# Altium PCB DL-5新款球锁-20201230.PcbDoc (part 1 of 2)
Units mm, origin at the board's own origin, x right, y up, seen from the top; angles counter-clockwise.
Board outline 55.99 x 50 mm, 4 copper layers (Top Layer, POWER, GND, Bottom Layer); 97 components, 70 nets, 304 pads, 134 vias.
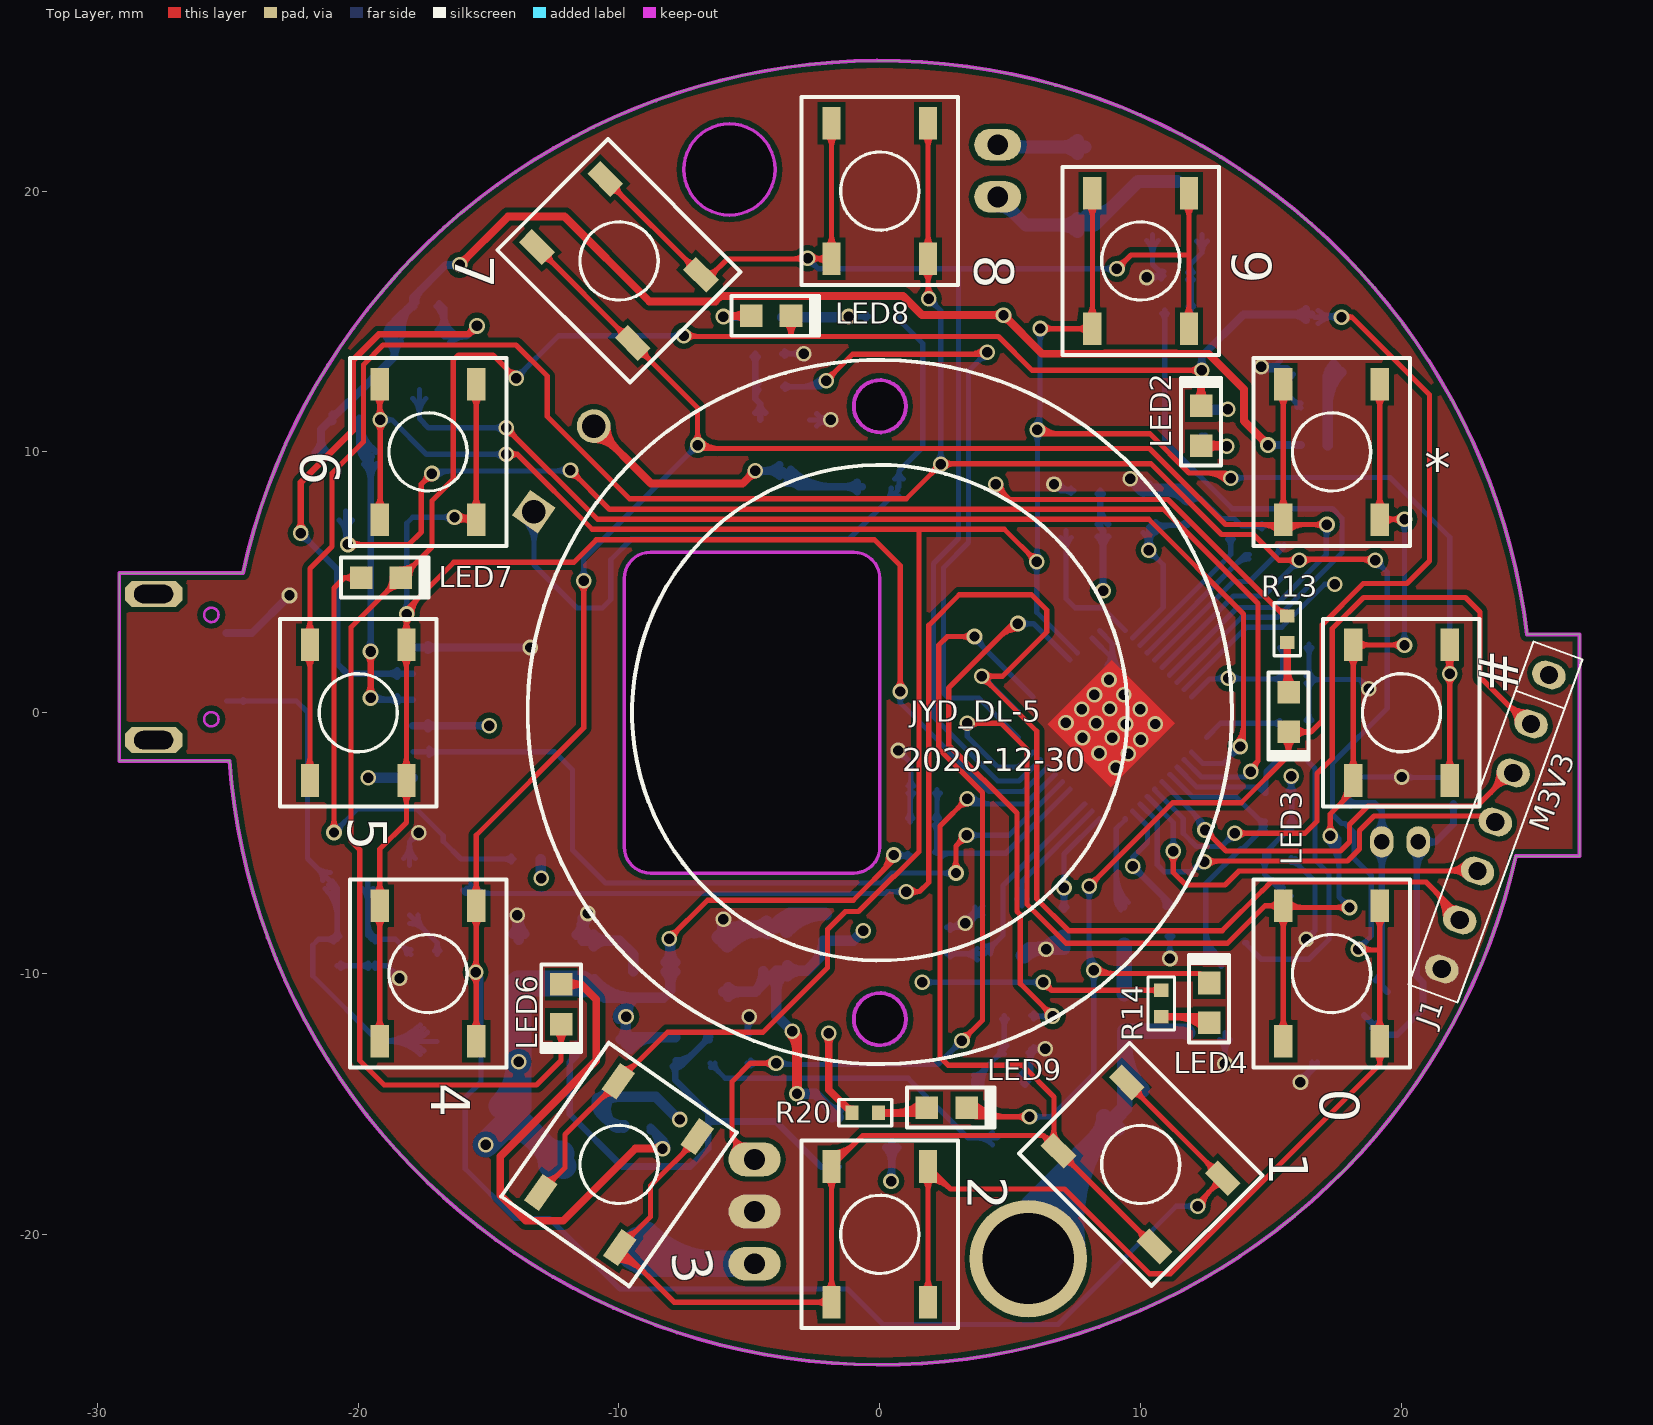
[diagram p0: Top Layer view]
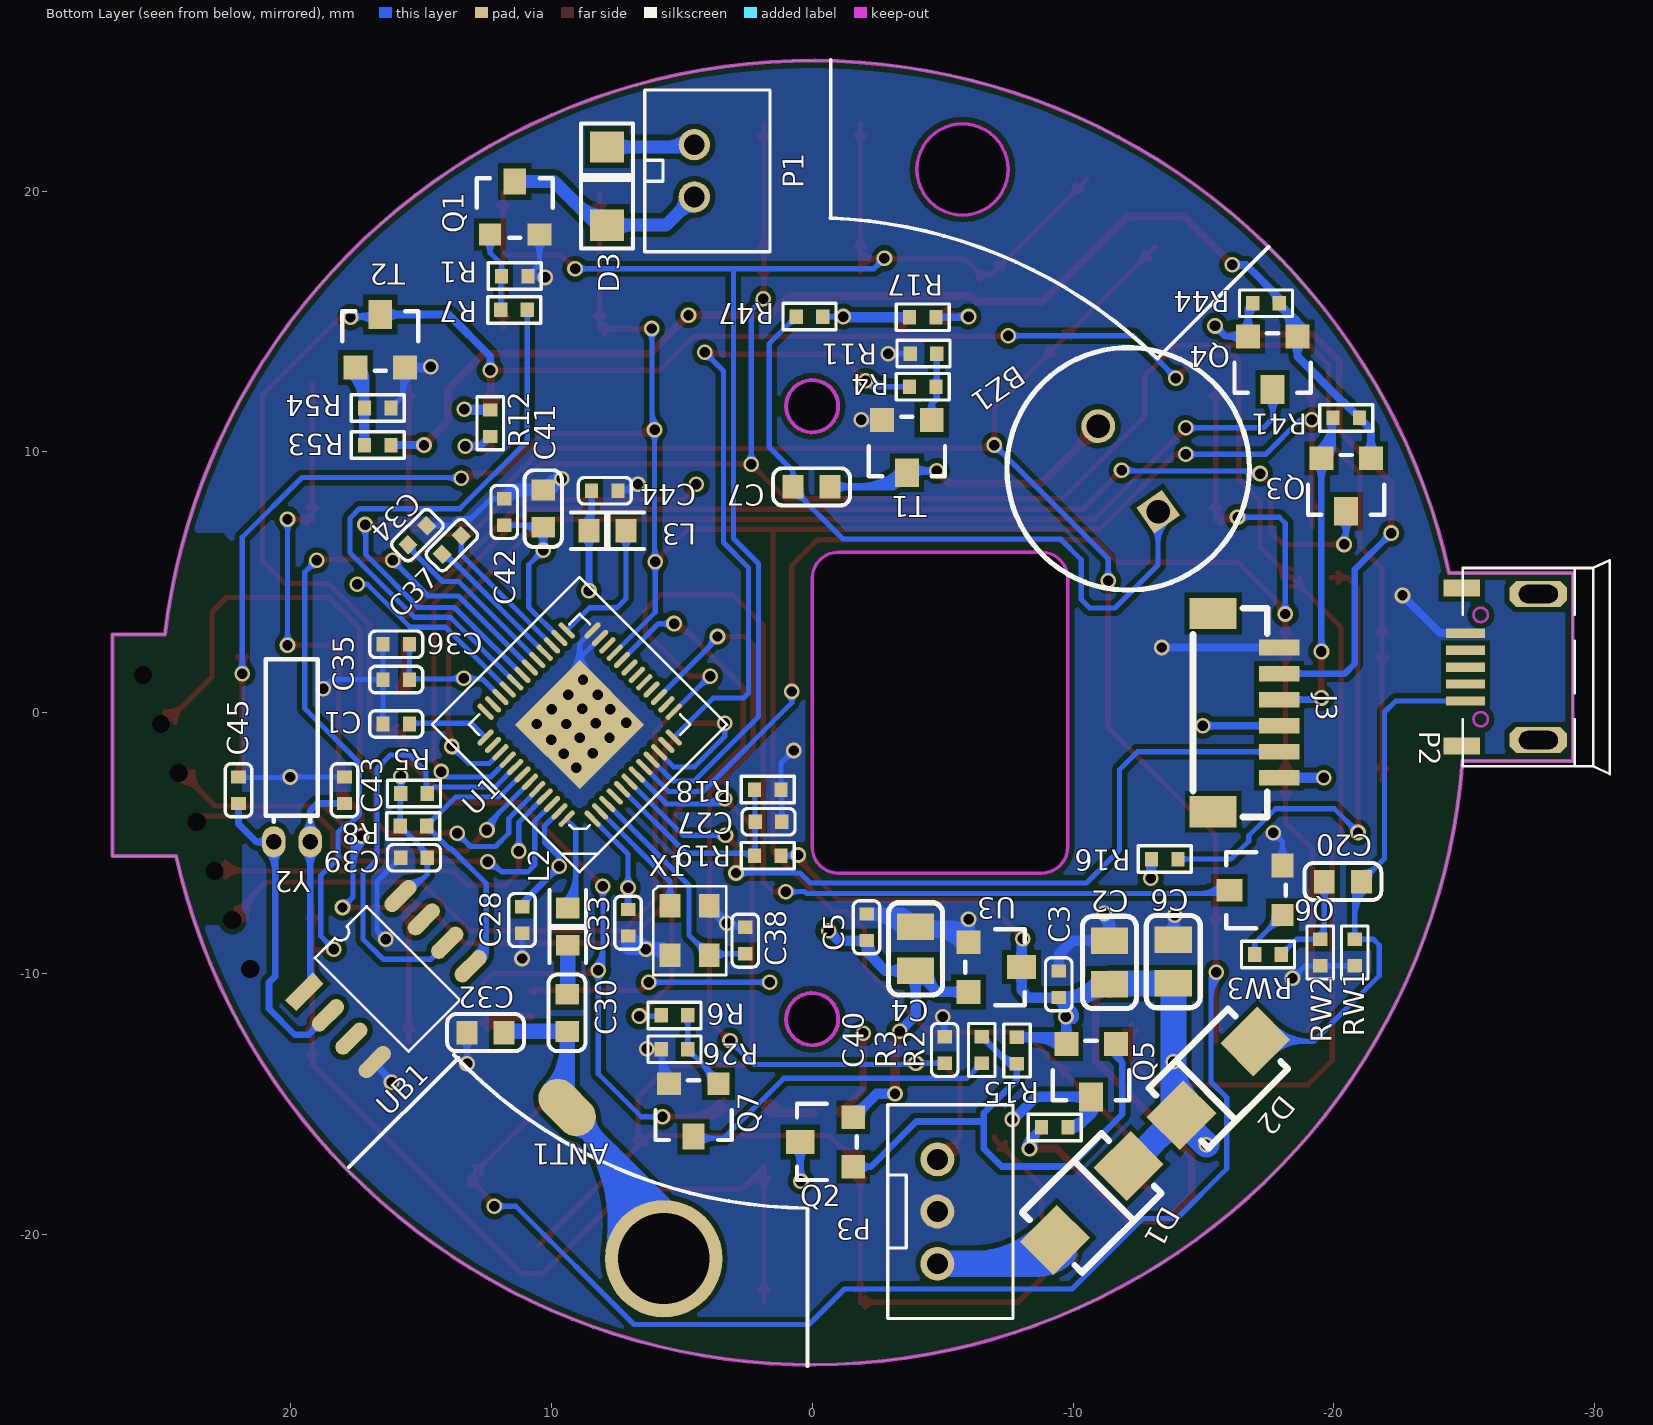
[diagram p1: Bottom Layer view, seen from below]
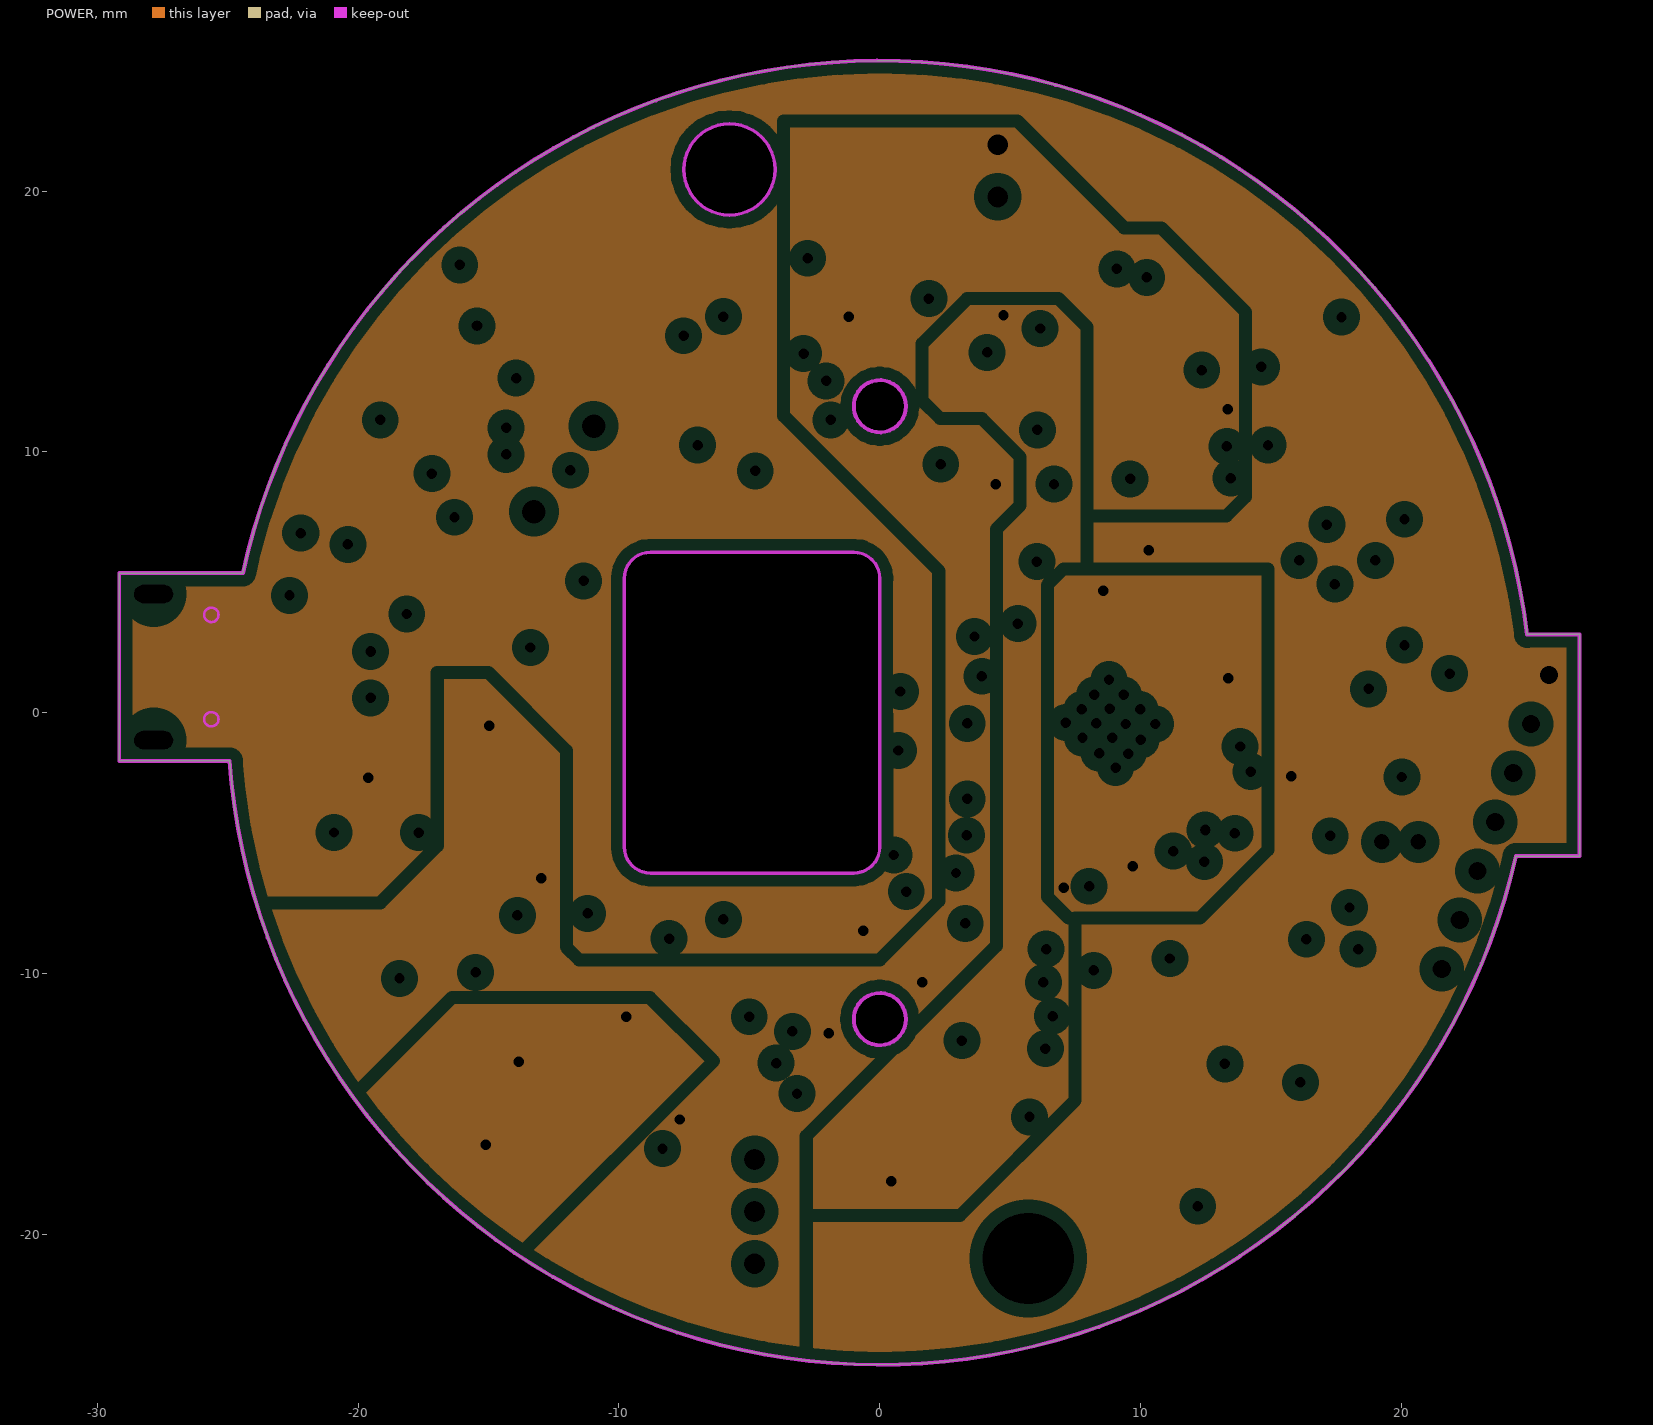
[diagram p2: POWER, clearances drawn from the general rule]
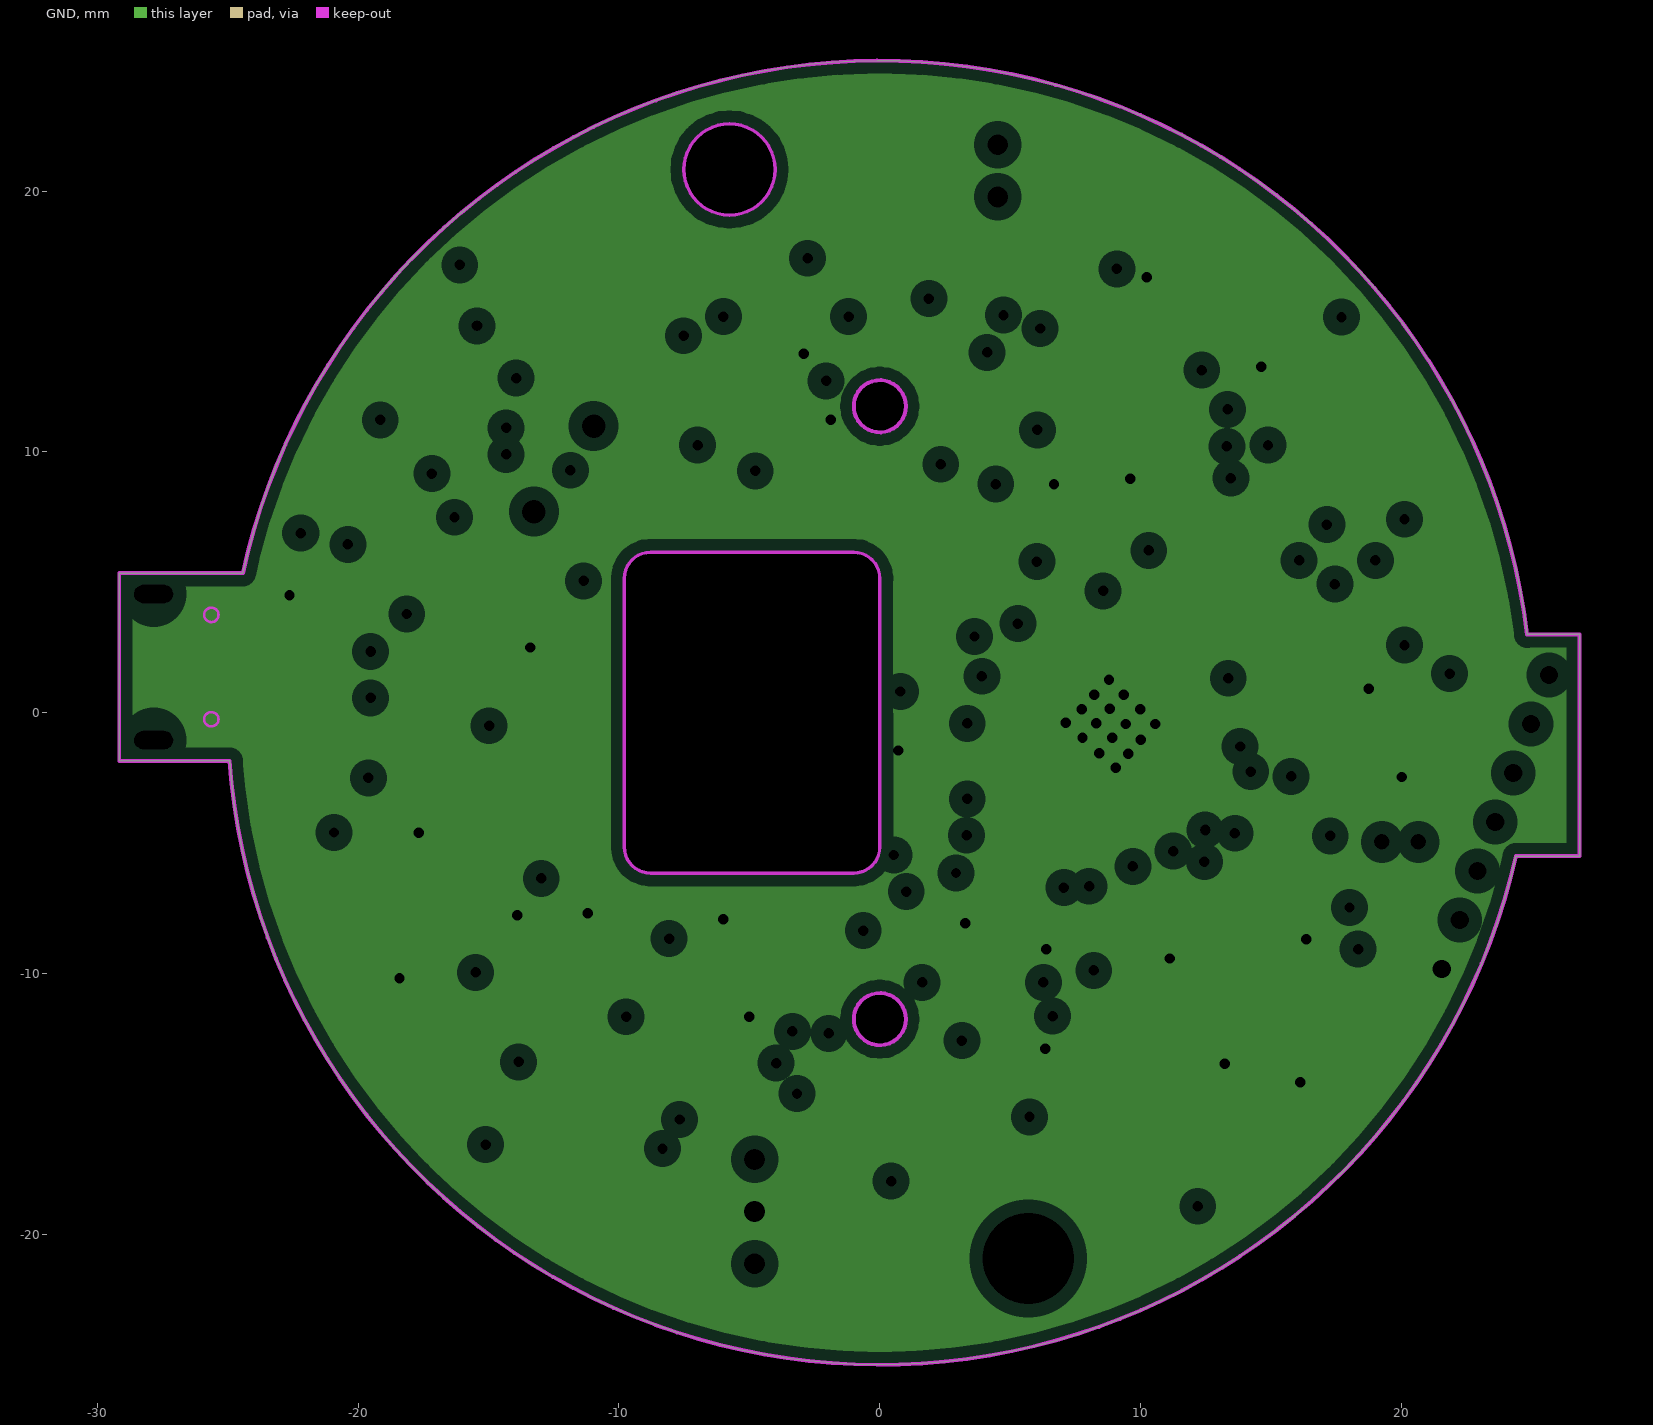
[diagram p3: GND, clearances drawn from the general rule]
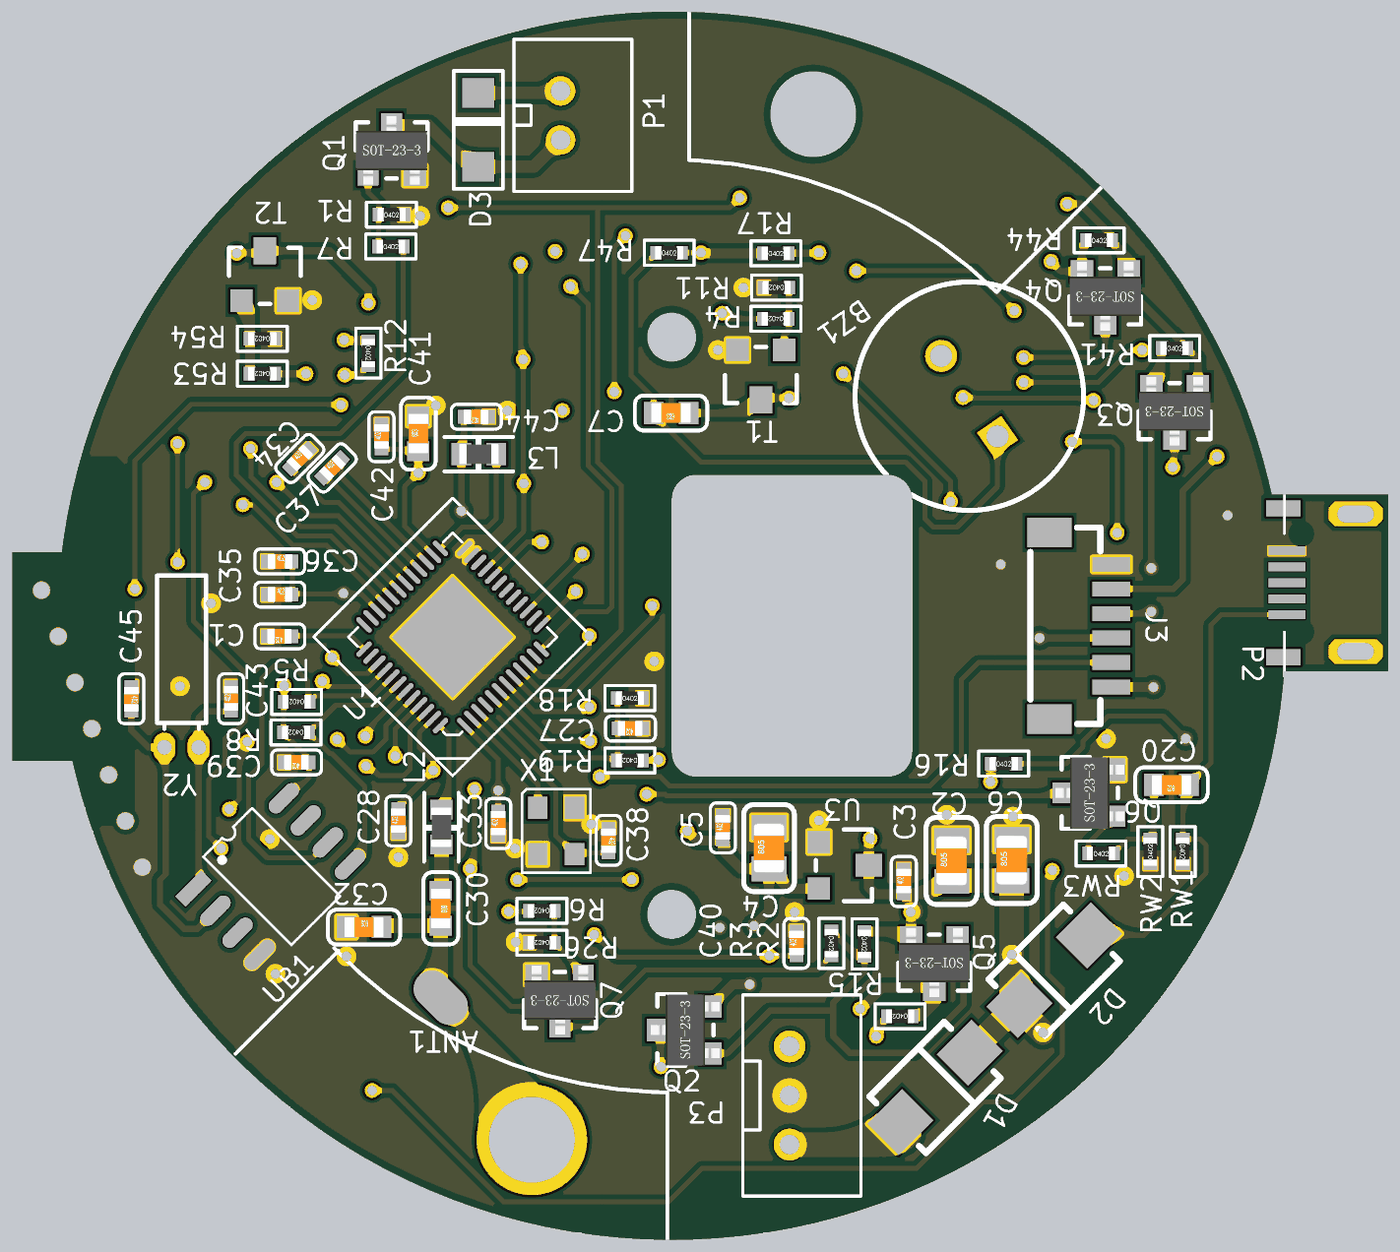
[diagram p5: 3D render of the assembled board from below, using the file's embedded part models]

## Layer stack, top to bottom
Top Layer: signal copper 0.0356
Dielectric: core 0.32, FR-4, Dk 4.8
POWER: plane copper 0.0356, net (Multiple Nets)
Dielectric: prepreg 0.32, FR-4, Dk 4.8
GND: plane copper 0.0356, net GND
Dielectric: core 0.32, FR-4, Dk 4.8
Bottom Layer: signal copper 0.0356

## Board outline
-29.159,-1.85 -29.159,5.35 -24.42,5.35 -24.42,5.352 cw(c0,0) 24.82,2.998 24.841,3 26.833,3 26.833,-5.5 24.409,-5.5 24.389,-5.495 cw(c0,0) -24.931,-1.851 -24.931,-1.85
cut-out: -7.513,20.828 ccw(c-5.763,20.828) -5.763,19.078 ccw(c-5.763,20.828) -4.013,20.828 ccw(c-5.763,20.828) -5.763,22.578 ccw(c-5.763,20.828)
cut-out: -1,11.75 ccw(c0,11.75) 0,10.75 ccw(c0,11.75) 1,11.75 ccw(c0,11.75) 0,12.75 ccw(c0,11.75)
cut-out: -1,-11.75 ccw(c0,-11.75) 0,-12.75 ccw(c0,-11.75) 1,-11.75 ccw(c0,-11.75) 0,-10.75 ccw(c0,-11.75)
cut-out: -9.794,-5.15 -9.794,5.15 cw(c-8.794,5.15) -8.794,6.15 -1,6.15 cw(c-1,5.15) 0,5.15 0,-5.15 cw(c-1,-5.15) -1,-6.15 -8.794,-6.15 cw(c-8.794,-5.15)

## Design rules (kind name [scope] priority, off if disabled: settings)
Clearance Clearance_3 [All] p1 off: gap=0.2
Clearance Clearance_2 [(IsWire)or(IsThruPin)or(IsFill)or(InPolygon)or(IsKeepOut)] p2 off: gap=0.178
Clearance Clearance_1 [InComponent('P2')] p3 off: gap=0.178
Clearance [All] p4: gap=0.18
ComponentClearance [All] p1: gap=0 collisioncheckmode=3 verticalgap=0 showdistances=FALSE
HoleSize [All] p1: absolutevalues=TRUE maxlimit=12.7 minlimit=0.025 maxpercent=80.000 minpercent=20.000
MinimumSolderMaskSliver [All] p1: minsoldermaskwidth=0
PlaneClearance [All] p1: clearance=0.508
PlaneConnect [All] p1: planeconnectstyle=Direct reliefexpansion=0.508 reliefentries=4 reliefconductorwidth=0.254 reliefairgap=0.254
PolygonConnect PolygonConnect_1 [IsVia] p1: connectstyle=Direct reliefconductorwidth=0.254 reliefentries=4 polygonreliefangle="90 Angle" airgapwidth=0.254
PolygonConnect [All] p2: connectstyle=Direct reliefconductorwidth=0.254 reliefentries=4 polygonreliefangle="90 Angle" airgapwidth=0.254
RoutingVias [All] p1: holewidth=0.4 width=0.6 viastyle="Through Hole" minholewidth=0.4 minwidth=0.6 maxholewidth=5 maxwidth=6
SilkToSilkClearance [All] p1: silktosilkclearance=0
SilkToSolderMaskClearance [IsPad] p1: minsilkscreentomaskgap=0 clearancetoexposedcopper=TRUE
SolderMaskExpansion [All] p1: expansion=0.102
Width [All] p1: maxlimit=2 minlimit=0.15 preferedwidth=0.2
21 further rules are at their usual default settings.

## Components (designator, comment, footprint, x,y, rotation, side; value= is the part's Value field where it differs from the comment)
0 "SW" KEY_5.2*3.7*6.4 17.322,-10 r270 top locked
1 "SW" KEY_5.2*3.7*6.4 10.001,-17.321 r315 top locked
2 "SW" KEY_5.2*3.7*6.4 0.001,-20 r270 top
3 "SW" KEY_5.2*3.7*6.4 -9.999,-17.321 r55 top
4 "SW" KEY_5.2*3.7*6.4 -17.319,-10 r270 top locked
5 "SW" KEY_5.2*3.7*6.4 -19.999,0 r90 top locked
6 "SW" KEY_5.2*3.7*6.4 -17.319,10 r90 top
7 "SW" KEY_5.2*3.7*6.4 -9.999,17.321 r135 top locked
8 "SW" KEY_5.2*3.7*6.4 0.001,20 r270 top locked
9 "SW" KEY_5.2*3.7*6.4 10.001,17.321 r90 top locked
# "SW" KEY_5.2*3.7*6.4 20.001,0 r270 top
* "SW" KEY_5.2*3.7*6.4 17.322,10 r90 top locked
ANT1 "ANT" ANT_mark 9.398,-15.138 r45 bottom
BZ1 "BUZZER" BUZZER_D93_L40 -12.116,9.347 r55 bottom
C1 "100nF" 0402C 15.951,-0.432 r0 bottom
C2 "10uF" 0805C -11.393,-9.574 r90 bottom
C3 "100nF" 0402C -9.449,-10.414 r90 bottom
C4 "10uF" 0805C -3.962,-9.054 r90 bottom
C5 "100nF" 0402C -2.083,-8.23 r90 bottom
C6 "220uF" 0805C -13.844,-9.541 r90 bottom
C7 "10uF" 0603C 0.025,8.661 r0 bottom
C20 "10uF" 0603C -20.345,-6.477 r0 bottom
C27 "1nF" 0402C 1.676,-4.183 r0 bottom
C28 "1uF" 0402C 11.125,-7.95 r90 bottom
C30 "1.5pF" 0603C 9.398,-11.506 r270 bottom
C32 "1pF" 0603C 12.522,-12.268 r180 bottom
C33 "100nF" 0402C 7.061,-8.052 r90 bottom
C34 "100nF" 0402C 15.138,6.807 r135 bottom
C35 "1uF" 0402C 15.951,1.27 r180 bottom
C36 "100nF" 0402C 15.951,2.621 r180 bottom
C37 "100nF" 0402C 13.818,6.426 r135 bottom
C38 "2.7pF" 0402C 2.565,-8.738 r270 bottom
C39 "100nF" 0402C 15.265,-5.563 r0 bottom
C40 "1nF" 0402C -5.08,-12.929 r90 bottom
C41 "10uF" 0603C 10.312,7.823 r90 bottom
C42 "100nF" 0402C 11.811,7.696 r90 bottom
C43 "22pF" 0402C 17.932,-2.972 r90 bottom
C44 "10uF" 0402C 7.95,8.509 r0 bottom
C45 "22pF" 0402C 21.996,-2.972 r270 bottom
D1 "SS14" DO-214AA -10.719,-18.796 r315 bottom
D2 "SS14" DO-214AA -15.57,-14.021 r135 bottom
D3 "IN4148" SOD-123 7.874,20.193 r90 bottom
J1 "7P" 7P-2.0MM 25.654,1.448 r250 top
J3 "指纹串口" "6P-1.0mm 立式" -16.637,0 r270 bottom
L2 "2nH" 0603L 9.373,-8.204 r90 bottom
L3 "2.2UH" 0603L 7.849,6.985 r0 bottom
LED2 "BLUE" 0603LED 12.319,10.998 r90 top
LED3 "BLUE" 0603LED 15.672,0.025 r270 top
LED4 "BLUE" 0603LED 12.624,-11.125 r90 top
LED6 "BLUE" 0603LED -12.217,-11.176 r270 top
LED7 "BLUE" 0603LED -19.126,5.182 r0 top
LED8 "BLUE" 0603LED -4.166,15.215 r0 top
LED9 "BLUE" 0603LED 2.565,-15.138 r0 top
P1 "外接磁线圈" B2B-PH 4.521,20.777 r90 bottom
P2 "MICROUSB" MICRO-USB_F-B -26.441,1.75 r90 bottom
P3 "电池盒" B3B-PH -4.801,-19.126 r90 bottom
Q1 "S8050" "SOT-23 - BCE" 11.405,19.355 r180 bottom
Q2 "SI2301" "SOT-23 - GDS" -0.559,-16.459 r90 bottom
Q3 "BSS123W" "SOT-23 - GDS" -20.472,8.738 r0 bottom
Q4 "BSS123W" "SOT-23 - GDS" -17.653,13.411 r0 bottom
Q5 "SI2301" "SOT-23 - GDS" -10.693,-13.716 r0 bottom
Q6 "PMBT3904" "SOT-23 - BCE" -17.018,-6.807 r90 bottom
Q7 "PMBT3904" "SOT-23 - BCE" 4.547,-15.24 r0 bottom
R1 "10K" 0402R#1 11.405,16.739 r180 bottom
R2 "100K" 0402R#1 -7.849,-12.954 r270 bottom
R3 "1K" 0402R#1 -6.502,-12.929 r270 bottom
R4 "200R" 0402R#1 -4.242,12.497 r0 bottom
R5 "10K" 0402R#1 15.265,-3.099 r0 bottom
R6 "4.7K" 0402R#1 5.283,-11.608 r0 bottom
R7 "1K" 0402R#1 11.43,15.443 r180 bottom
R8 "10K" 0402R#1 15.291,-4.343 r0 bottom
R11 "10K" 0402R#1 -4.267,13.767 r0 bottom
R12 "1K" 0402R#1 12.344,11.1 r270 bottom
R13 "1K" 0402R#1 15.621,3.2 r270 top
R14 "1K" 0402R#1 10.795,-11.151 r270 top
R15 "1K" 0402R#1 -9.296,-15.9 r0 bottom
R16 "1K" 0402R#1 -13.513,-5.613 r180 bottom
R17 "1K" 0402R#1 -4.242,15.164 r180 bottom
R18 "100K%1" 0402R#1 1.702,-2.946 r180 bottom
R19 "510%1" 0402R#1 1.702,-5.486 r0 bottom
R20 "1K" 0402R#2 -0.559,-15.342 r180 top
R26 "10K" 0402R#1 5.281,-12.905 r0 bottom
R41 "10K" 0402R#1 -20.472,11.303 r180 bottom
R44 "10K" 0402R#1 -17.399,15.697 r180 bottom
R47 "10R" 0402R#1 0.102,15.189 r180 bottom
R53 "1K" 0402R#1 16.662,10.262 r0 bottom
R54 "10K" 0402R#1 16.662,11.684 r0 bottom
RW1 "100K" 0402R#1 -20.803,-9.195 r270 bottom
RW2 "100K" 0402R#1 -19.482,-9.195 r90 bottom
RW3 "100R" 0402R#1 -17.475,-9.271 r180 bottom
T1 "SS8050" SOT-23-3L -3.632,10.211 r0 bottom
T2 "SS8050" SOT-23-3L 16.561,14.249 r180 bottom
U1 "BK3435QFN48_A" QFN48_6*6*0.4 8.915,-0.457 r45 bottom
U3 "HT7533" SOT-23-3L -7.01,-9.754 r270 bottom
UB1 "PCF8563" SOP8 16.281,-10.211 r135 bottom
X1 "16MHZ" XTAL3225 4.699,-8.357 r270 bottom
Y2 "32.768KHZ" 晶振-9 20.65,-4.953 r180 bottom

## Footprints (in the part's own frame and the unit in brackets; to place one, negate y for a bottom-side part, rotate by r counter-clockwise, add the part's x,y. Pads: shape width x height; smd on the part's side, far side on the other; paste and mask are expansions set on the pad)
"6P-1.0mm 立式" [mm]
  rect 0.6x1.55 smd: 1(2.5,1.262) 2(1.5,1.262) 3(0.5,1.262) 4(-0.5,1.262) 5(-1.5,1.262) 6(-2.5,1.262)
  rect 1.2x1.8 smd: 7(-3.8,-1.263) 8(3.8,-1.263)
  silkscreen extent -4,-2.04 4,0.81
7P-2.0MM [mm]
  oval 1x1.3 / inner oval 1x1.3 / far side round 0 hole 0.7 mask+0.05: 1(0,0) 2(2,0) 3(4,0) 4(6,0) 5(8,0) 6(10,0) 7(12,0)
  silkscreen extent -1,-1 13,1
0402C [mil]
  rect 20x22 smd mask+2: 1(-20,0) 2(20,0)
  silkscreen extent -40,-20 40,20, body extent -19,-12 20,12, height 8
0402R#1 [mil]
  rect 20x22 smd mask+2: 1(-20,0) 2(20,0)
  silkscreen extent -40,-20 40,20, body extent -23,-11 23,11, height 16
0402R#2 [mil]
  rect 20x22 smd mask+2: 1(20,0) 2(-20,0)
  silkscreen extent -40,-20 40,20, body extent -23,-11 23,11, height 16
0603C [mm]
  rect 0.8x0.9 smd: 1(-0.711,0) 2(0.711,0)
  silkscreen extent -1.47,-0.71 1.47,0.71, body extent -0.8,-0.4 0.8,0.4, height 0.3
0603L [mm]
  rect 0.8x0.9 smd: 1(-0.711,0) 2(0.711,0)
  silkscreen extent -1.4,-0.7 1.4,0.7, body extent -0.82,-0.41 0.82,0.41, height 0.46
0603LED [mil]
  rect 34x34 smd: 1(-30,0) 2(30,0)
  silkscreen extent -60,-30 72,30, body extent -32,-16 31,16, height 24
0805C [mil]
  rect 40x56 smd: 1(-33,0) 2(33,0)
  silkscreen extent -70,-41 70,41, body extent -39,-25 39,25, height 30
ANT_mark [mm]
  oval 2.5x1.5 smd: 1(0,0)
B2B-PH [mm]
  round 1.2 / inner round 1.2 / far side oval 1.2x1.8 hole 0.8 mask+0.05: 1(-1,0) 2(1,0)
  silkscreen extent -3.1,-2.9 3.1,1.9
B3B-PH [mm]
  round 1.3 / inner round 1.3 / far side oval 1.3x2 hole 0.8 mask+0.05: 1(-2,0) 2(0,0) 3(2,0)
  silkscreen extent -4.1,-2.9 4.1,1.9
BUZZER_D93_L40 [mm]
  rect 1.2x1.2 hole 0.9: 1(-2,0)
  round 1.3 hole 0.9: 2(2,0)
  silkscreen extent -4.65,-4.65 4.65,4.65
DO-214AA [mm]
  rect 2x1.8 smd: 1(2,0) 2(-2,0)
  silkscreen extent -2.15,-1.62 2.15,1.62
KEY_5.2*3.7*6.4 [mm]
  rect 1.25x0.7 smd: 1(-2.6,1.85) 1(2.6,1.85) 2(-2.6,-1.85) 2(2.6,-1.85)
  silkscreen extent -3.6,-3 3.6,3
MICRO-USB_F-B [mm]
  rect 0.36x1.5 smd mask+0.05: 1(-1.3,1.4) 2(-0.65,1.4) 3(0,1.4) 4(0.65,1.4) 5(1.3,1.4)
  oct 1x2.2 hole 0.7 slot 1.5 at 90 deg mask+0.05: 6(2.8,-1.4) 7(-2.8,-1.4)
  rect 0.65x1.4 smd: 8(3.029,1.543) 9(-3.029,1.543)
  Keep-Out Layer circle w0.1: c2,0.813 r0.275
  Keep-Out Layer circle w0.1: c-2,0.813 r0.275
  silkscreen extent -4.1,-4.14 4.1,1.5
QFN48_6*6*0.4 [mm]
  rect 3.5x3.5 smd: 0(0,0)
  oval 0.8x0.2 smd: 1(-2.9,2.2) 2(-2.9,1.8) 3(-2.9,1.4) 4(-2.9,1) 5(-2.9,0.6) 6(-2.9,0.2) 7(-2.9,-0.2) 8(-2.9,-0.6) 9(-2.9,-1) 10(-2.9,-1.4) 11(-2.9,-1.8) 12(-2.9,-2.2) 25(2.9,-2.2) 26(2.9,-1.8) 27(2.9,-1.4) 28(2.9,-1) 29(2.9,-0.6) 30(2.9,-0.2) 31(2.9,0.2) 32(2.9,0.6) 33(2.9,1) 34(2.9,1.4) 35(2.9,1.8) 36(2.9,2.2)
  oval 0.2x0.8 smd: 13(-2.2,-2.9) 14(-1.8,-2.9) 15(-1.4,-2.9) 16(-1,-2.9) 17(-0.6,-2.9) 18(-0.2,-2.9) 19(0.2,-2.9) 20(0.6,-2.9) 21(1,-2.9) 22(1.4,-2.9) 23(1.8,-2.9) 24(2.2,-2.9) 37(2.2,2.9) 38(1.8,2.9) 39(1.4,2.9) 40(1,2.9) 41(0.6,2.9) 42(0.2,2.9) 43(-0.2,2.9) 44(-0.6,2.9) 45(-1,2.9) 46(-1.4,2.9) 47(-1.8,2.9) 48(-2.2,2.9)
  silkscreen extent -4,-4 4,4
SOD-123 [mm]
  rect 1.2x1.3 smd mask+0.05: 1(-1.5,0) 2(1.5,0)
  silkscreen extent -2.4,-1 2.4,1
SOP8 [mm]
  rect 1.5x0.6 smd mask+0.05: 1(-2.6,1.905)
  oval 1.5x0.6 smd mask+0.05: 2(-2.6,0.635) 3(-2.6,-0.635) 4(-2.6,-1.905) 5(2.6,-1.905) 6(2.6,-0.635) 7(2.6,0.635) 8(2.6,1.905)
  round 0.4 on Bottom Overlay mask+0.05: ""(-0.949,1.905)
  silkscreen extent -1.4,-2.54 1.4,2.54
"SOT-23 - BCE" [mm]
  rect 0.85x0.85 smd: B(-0.95,-1.016)
  rect 0.85x1 smd: C(0,1.016)
  rect 0.914x0.85 smd: E(0.95,-1.016)
  silkscreen extent -1.46,-1.14 1.46,1.14, body extent -1.45,-1.4 1.45,1.4, height 1.2
"SOT-23 - GDS" [mil]
  rect 36x43.31 smd: D(0,40)
  rect 36x36 smd: G(-37.4,-40) S(37.4,-40)
  silkscreen extent -57,-45 58,45, body extent -57,-55 57,55, height 47
SOT-23-3L [mil]
  rect 36x36 smd: 1(-37.4,-40) 2(37.4,-40)
  rect 36x43.31 smd: 3(0,40)
  silkscreen extent -57,-45 58,45
XTAL3225 [mm]
  rect 0.9x0.8 smd: 1(-0.95,-0.75) 2(0.95,-0.75) 3(0.95,0.75) 4(-0.95,0.75)
  silkscreen extent -1.7,-1.4 1.7,1.4
晶振-9 [mm]
  oval 0.9x1.2 hole 0.6: 1(0,0) 2(1.4,0)
  rect 0x0 smd: 3(0.635,8)
  silkscreen extent -0.3,0.76 1.7,7

## Part data
0 1 2 3 4 5 6 7 8 9 # *: "Switch"
ANT1: library part Socket, "Socket"
BZ1: "Buzzer"
C1 C28 C30 C32 C33 C34 C35 C36 C37 C38 C41 C42 C44: library part Cap, "Capacitor"
C2 C4: library part CAP-P, "Capacitor, tolerance ±20%"
C3: library part "CAP NP"
C5 C6 C7 C20 C27: library part CAP-NP, "Capacitor, Ceramic"
C39 C40 C43 C45: library part C
D1 D2 D3: library part D
J3: library part "Header 6", "Header, 6-Pin"
L2 L3: "Power Inductor, 4.7uH, 0.7A, 260mR DCR"
LED2 LED3 LED4 LED6 LED7 LED8 LED9: library part LED
P1: library part "Header 2", "Header, 2-Pin"
P2: library part MHDR1X2, "Header, 2-Pin"
P3: library part "Header 3", "Header, 3-Pin"
Q1: library part PMBT3904_Dup1
Q2 Q5: library part PWRMOSFET_EP_DGS_0
Q3 Q4: library part BSS123L_0
R1 R7 R41 R44: library part RES
R2 R3 R5 R6 R8 R12 R13 R14 R15 R16 R17 R20 R26 R53 R54 RW1 RW2 RW3: library part R
R4 R11 R47: library part R_Dup1
R18 R19: library part Res2, "Resistor"
T1 T2: library part NPN_BJT, "Bipolar Junction Transistor"
U1: library part EFR32BG1-QFN48
U3: library part XC6206P302M
UB1: library part IC8
Y2: library part 晶振

## Free pads (board coordinates)
  round 4.5 hole 3.5: 1(5.692,-20.929)

## Via types
v1: diameter 0.6, hole 0.4, Top Layer to Bottom Layer, 110 vias
v2: diameter 0.6, hole 0.4, Top Layer to Bottom Layer, tented both sides, 12 vias
v3: diameter 0.61, hole 0.406, Top Layer to Bottom Layer, 6 vias
v4: diameter 0.61, hole 0.4, Top Layer to Bottom Layer, 4 vias
v5: diameter 0.61, hole 0.406, Top Layer to Bottom Layer, tented both sides, 2 vias

## Nets (pads, with @x,y where several pads share a name; then routed paths per layer and width w, separated by ;. In a path a pad name is that pad's centre, name@x,y a point inside that pad or via, vN(x,y) a via of type N, cw(c..) or ccw(c..) an arc to the next point about the centre after c; other vN are vias at no path point)
ANT: ANT1.1 C30.2 C32.2 pad.1 | length 39.7
  Bottom Layer w0.6: pad.1@5.248,-21 cw(c8.142,-20.539) 6.07,-18.467 ; pad.1@5.692,-20.929 5.692,-19.124 pad.1@5.832,-18.984 ; pad.1@5.692,-18.844 ANT1.1@9.398,-15.138 ; pad.1@5.84,-20.905 cw(c9.578,-20.311) 6.902,-17.635 ; pad.1@6.433,-20.811 cw(c11.014,-20.083) 7.734,-16.803 ; pad.1@7.025,-20.717 cw(c12.45,-19.854) ANT1.1@8.566,-15.971 ; pad.1@7.618,-20.623 cw(c13.885,-19.626) ANT1.1@9.398,-15.138 ; 8.164,-16.541 cw(c9.374,-17.394) ANT1.1@9.121,-15.935 ; 8.485,-16.086 ccw(c7.919,-15.687) ANT1.1@8.601,-15.569 ; ANT1.1@8.594,-15.492 cw(c7.508,-15.492) 8.276,-16.26 cw(c9.044,-17.028) ANT1.1@9.044,-15.942 ; 9.398,-12.845 ccw(c11.692,-12.845) ANT1.1@10.07,-14.467 ; C32.2@11.811,-12.268 11.76,-12.217 C30.2@9.398,-12.217 ANT1.1@9.398,-15.138
BAT_ADC: C27.2 R18.1 R19.2 U1.5 | length 11.4
  Bottom Layer w0.2: C27.2@2.076,-4.317 cw(c1.813,-4.58) 2.184,-4.58 cw(c2.556,-4.58) C27.2@2.293,-4.317 ; C27.2@2.076,-4.048 ccw(c1.789,-3.762) 2.194,-3.762 ; R19.2@2.101,-5.352 ccw(c1.899,-5.15) 2.184,-5.15 ; R18.1@2.101,-3.081 cw(c1.876,-3.306) 2.194,-3.306 ; 2.184,-5.028 ccw(c2.643,-5.028) R19.2@2.319,-5.352 ; C27.2@2.184,-4.183 2.184,-5.385 4.836,-5.385 U1.5@7.289,-2.932 ; C27.2@2.194,-4.183 R18.1@2.194,-2.955 ; 2.194,-3.809 ccw(c2.533,-3.809) C27.2@2.293,-4.048 ; 2.194,-3.381 cw(c2.619,-3.381) R18.1@2.319,-3.081 ; R19.2@2.319,-5.57 cw(c2.766,-6.017) 2.766,-5.385
BEEP: R4.2 U1.12 | length 30.2
  Top Layer w0.2: v1(-2.057,12.725) -1.041,13.741 4.039,13.741 v1(4.115,13.818) ; v1@-2.057,12.925 ccw(c-2.057,13.408) -1.716,13.067 ccw(c-1.375,12.725) v1@-1.857,12.725 ; 3.448,13.741 ccw(c3.448,14.484) v1@3.973,13.959 ; 3.816,13.741 cw(c3.816,13.519) v1@3.973,13.676
  Bottom Layer w0.2: R4.2@-3.734,12.497 -2.286,12.497 v1(-2.057,12.725) cw(c-2.609,13.277) -2.609,12.497 ; R4.2@-3.625,12.388 cw(c-3.362,12.125) -3.362,12.497 cw(c-3.362,12.869) R4.2@-3.625,12.606 ; -3.092,12.497 ccw(c-3.092,13.76) v1@-2.199,12.867 ; v1@3.915,13.818 cw(c3.432,13.818) 3.773,13.476 cw(c4.115,13.135) v1@4.115,13.618 ; v1(4.115,13.818) 3.403,13.105 3.403,6.523 2.438,5.559 2.438,0.75 2.623,0.566 3.791,0.566 U1.12@5.309,-0.952
CE(RST): U1.16
GND: C1.2 C2.2 C3.2 C4.2 C5.2 C6.2 C27.1 C28.1 C32.1 C33.1 C34.2 C35.1 C36.1 C38.1 C39.2 C40.2 C41.2 C42.2 C43.2 C44.1 C45.1 J1.7 J3.6 P2.5 P3.2 Q1.E Q6.E Q7.E R1.2 R11.2 R18.2 R26.2 R54.1 RW1.2 RW2.1 T1.2 T2.2 U1.0 U1.23 U1.24 U3.1 UB1.4 X1.2 X1.4 | length 180.3
  Top Layer w0.2: v1@-5.004,-11.786 v1(-5.004,-11.659) ; v1(11.125,-9.423) v1@11.125,-9.398
  Bottom Layer w0.2: RW1.2@-20.803,-9.703 RW2.1@-19.482,-9.703 -18.898,-9.703 v1(-18.415,-10.185) ; RW1.2@-20.668,-9.812 cw(c-20.405,-10.075) -20.405,-9.703 cw(c-20.405,-9.331) RW1.2@-20.668,-9.594 ; RW2.1@-19.616,-9.812 ccw(c-19.879,-10.075) -19.879,-9.703 ccw(c-19.879,-9.331) RW2.1@-19.616,-9.594 ; RW2.1@-19.348,-9.812 cw(c-19.085,-10.075) -19.085,-9.703 cw(c-19.085,-9.331) RW2.1@-19.348,-9.594 ; v1@-18.615,-10.185 ccw(c-19.098,-10.185) -18.756,-9.844 ccw(c-18.415,-9.503) v1@-18.415,-9.985 ; Q6.E@-18.264,-5.595 ccw(c-18.819,-5.04) -18.034,-5.04 ccw(c-17.249,-5.04) Q6.E@-17.804,-5.595 ; Q6.E@-18.034,-5.857 -18.034,-4.953 v1(-17.678,-4.597) ; v1@-17.878,-4.597 cw(c-18.361,-4.597) -18.02,-4.939 cw(c-17.678,-5.28) v1@-17.678,-4.797 ; C40.2@-5.189,-12.312 ccw(c-5.452,-12.049) -5.08,-12.049 ccw(c-4.708,-12.049) C40.2@-4.971,-12.312 ; v1@-5.145,-11.8 cw(c-5.303,-11.957) -5.08,-11.957 ; C40.2@-5.08,-12.421 -5.08,-11.735 v1(-5.004,-11.659) ; C40.2@-5.08,-12.325 cw(c-4.337,-12.325) v1@-4.862,-11.8 ; R11.2@-3.759,13.767 v1(-2.921,13.767) ; R11.2@-3.65,13.658 cw(c-3.387,13.395) -3.387,13.767 cw(c-3.387,14.139) R11.2@-3.65,13.876 ; v1@-3.062,13.625 ccw(c-3.404,13.284) -3.404,13.767 ccw(c-3.404,14.25) v1@-3.062,13.908 ; T1.2@-2.682,11.227 v1(-1.88,11.227) ; T1.2@-2.417,10.988 cw(c-1.88,10.504) v1(-1.88,11.227) ; T1.2@-2.417,11.466 ccw(c-1.88,11.95) v1(-1.88,11.227) ; v1@-2.069,11.162 ccw(c-2.306,11.082) -2.241,11.324 ccw(c-2.176,11.565) v1@-2.011,11.377 ; v1@-2.069,11.291 cw(c-2.306,11.372) -2.241,11.13 cw(c-2.176,10.888) v1@-2.011,11.076 ; v1@-2.021,11.085 ccw(c-2.362,10.744) -2.362,11.227 ccw(c-2.362,11.71) v1@-2.021,11.368 ; v1@0.711,-1.648 cw(c0.711,-2.131) 1.053,-1.789 cw(c1.394,-1.448) v1@0.911,-1.448 ; v1(0.711,-1.448) 1.194,-1.93 R18.2@1.194,-2.946 1.168,-2.972 C27.1@1.168,-4.183 ; C27.1@1.06,-4.048 ccw(c0.797,-3.785) 1.168,-3.785 ccw(c1.54,-3.785) C27.1@1.277,-4.048 ; R18.2@1.085,-3.081 cw(c0.883,-3.282) 1.168,-3.282 ; R18.2@1.085,-2.812 ccw(c0.822,-2.549) 1.194,-2.549 ccw(c1.566,-2.549) R18.2@1.303,-2.812 ; 1.168,-3.405 cw(c1.627,-3.405) R18.2@1.303,-3.081 ; C38.1@2.7,-8.338 cw(c2.963,-8.601) 2.963,-8.23 cw(c2.963,-7.858) C38.1@2.7,-8.121 ; 2.971,-8.23 ccw(c2.971,-7.843) v1(3.277,-8.078) ; v1@3.119,-7.956 cw(c2.565,-7.533) C38.1@2.565,-8.23 3.126,-8.23 v1(3.277,-8.078) ; v1@3.234,-7.883 ccw(c3.092,-7.256) X1.4@3.649,-7.577 ; v1@3.277,-7.878 ccw(c3.277,-7.395) 3.619,-7.737 ccw(c3.96,-8.078) v1@3.477,-8.078 ; v1@3.329,-7.885 ccw(c3.43,-7.508) X1.4@3.625,-7.846 ; v1@3.352,-8.004 cw(c3.949,-8.602) X1.4@3.949,-7.757 ; v1@3.471,-8.13 cw(c4.026,-8.279) X1.4@3.739,-7.781 ; v1@3.471,-8.026 cw(c3.702,-7.964) 3.495,-7.845 ; v1@3.472,-7.883 ccw(c3.045,-7.457) X1.4@3.649,-7.457 ; X1.4@3.949,-7.407 v1(3.277,-8.078) ; Q7.E@5.311,-13.983 ccw(c4.334,-12.905) R26.2@5.789,-12.905 ; Q7.E@5.445,-14.131 ccw(c4.742,-13.356) 5.789,-13.356 ; Q7.E@5.497,-14.224 5.789,-13.932 R26.2@5.789,-12.905 ; Q7.E@5.579,-14.28 ccw(c5.151,-13.807) Q7.E@5.789,-13.807 ; R26.2@5.68,-13.039 cw(c5.417,-13.302) 5.789,-13.302 cw(c6.16,-13.302) R26.2@5.898,-13.039 ; R26.2@5.802,-12.905 ccw(c5.802,-12.33) v1@6.209,-12.736 ; R26.2@5.898,-13.014 cw(c6.16,-13.277) 6.16,-12.905 cw(c6.16,-12.533) R26.2@5.898,-12.796 ; R26.2@5.932,-12.905 cw(c5.932,-13.295) v1@6.209,-13.019 ; v1@6.163,-12.808 cw(c5.956,-12.732) 6.013,-12.944 cw(c6.058,-13.113) v1@6.194,-13.003 ; v1(6.35,-12.878) 6.323,-12.905 R26.2@5.789,-12.905 ; v1@6.856,8.858 ccw(c7.442,9.175) C44.1@7.442,8.509 6.934,8.509 v1(6.68,8.763) ccw(c7.107,8.994) 7.107,8.509 ; C44.1@7.333,8.4 ccw(c7.07,8.137) 7.07,8.509 ccw(c7.07,8.881) C44.1@7.333,8.618 ; U1.0@7.99,0.909 ccw(c6.807,2.654) 8.915,2.654 ; U1.0@8.05,0.598 cw(c8.394,0.767) U1.0@8.127,1.042 ; U1.0@8.052,0.949 cw(c8.48,0.539) U1.0@8.711,1.086 ; U1.0@8.102,0.743 ccw(c7.063,2.277) 8.915,2.277 ccw(c10.768,2.277) U1.0@9.729,0.743 ; U1.0@8.132,0.775 cw(c8.819,0.124) U1.0@8.794,1.07 ; U1.23@8.138,2.866 8.915,2.088 ; U1.0@8.253,1.159 cw(c8.601,0.825) v1(8.788,1.27) ; U1.0@8.296,0.874 ccw(c8.447,1.304) U1.0@8.733,0.951 ; U1.0@8.323,0.866 ccw(c7.915,1.78) 8.915,1.78 ccw(c9.916,1.78) U1.0@9.507,0.866 ; U1.0@8.325,1.233 ccw(c8.654,0.894) v1(8.23,0.686) cw(c8.686,0.719) U1.0@8.34,1.018 ; U1.0@8.405,0.684 ccw(c8.053,1.471) 8.915,1.471 ccw(c9.778,1.471) U1.0@9.426,0.684 ; U1.0@8.409,0.774 cw(c8.913,1.022) U1.0@8.522,1.425 ; U1.0@8.416,0.945 ccw(c8.092,1.325) U1.0@8.589,1.286 ; U1.24@8.42,3.149 8.915,2.654 ; U1.0@8.429,0.665 cw(c9.184,0.587) U1.0@8.705,1.177 ; U1.0@8.429,0.7 cw(c9.367,0.768) U1.0@8.656,1.383 ; U1.0@8.433,0.96 cw(c8.736,0.605) U1.0@8.773,1.071 ; U1.0@8.454,1.369 cw(c8.722,1.112) U1.0@8.866,1.454 ; U1.0@8.465,1.126 cw(c8.801,0.807) v1(8.788,1.27) ; U1.0@8.477,0.861 cw(c8.903,0.553) U1.0@8.82,1.073 ; U1.0@8.513,0.911 ccw(c8.157,1.169) U1.0@8.591,1.238 ; U1.0@8.522,1.107 cw(c8.783,0.98) v1(8.788,1.27) ; U1.0@8.561,1.489 ccw(c8.84,1.363) U1.0@8.691,1.095 ; U1.0@8.647,1.129 cw(c7.999,0.481) U1.0@8.915,0.481 ; U1.0@8.647,1.411 ccw(c7.999,2.059) 8.915,2.059 ; U1.0@8.65,1.687 ccw(c8.946,1.554) v1(8.788,1.27) ; U1.0@8.672,0.294 ccw(c8.086,0.881) U1.0@8.915,0.881 ; U1.0@8.691,-0.005 cw(c8.331,-0.466) U1.0@8.915,-0.466 ; U1.0@8.693,1.446 ccw(c8.501,1.8) U1.0@8.887,1.686 ; U1.0@8.72,1.458 cw(c8.87,1.047) U1.0@9.233,1.29 ; U1.0@8.733,1.587 ccw(c9.067,1.482) v1(8.788,1.27) ; 8.74,1.885 ccw(c9.053,1.744) U1.0@8.886,1.445 ; U1.0@8.827,1.074 cw(c8.974,0.337) U1.0@9.51,0.864 ; 8.848,1.956 ccw(c9.445,1.77) U1.0@8.948,1.391 ; U1.0@8.882,1.093 cw(c9.005,0.861) U1.0@9.218,1.015 ; U1.0@8.905,1.745 ccw(c9.334,1.618) U1.0@8.957,1.378 ; U1.0@8.915,-0.457 8.915,2.088 ; U1.0@8.915,0.963 ccw(c8.482,0.963) v1(8.788,1.27) ; U1.0@8.915,1.577 cw(c8.482,1.577) v1(8.788,1.27) ; U1.0@9.066,1.225 cw(c8.831,0.935) U1.0@9.167,0.773 ; U1.0@9.083,1.202 ccw(c8.896,1.066) v1(8.788,1.27) ; U1.0@9.143,1.417 cw(c8.694,1.079) U1.0@9.176,0.789 ; U1.0@9.25,1.128 ccw(c8.888,0.771) v1(8.788,1.27) ; U1.0@9.263,1.065 cw(c9.065,0.822) v1(9.347,0.686) ccw(c8.968,0.914) U1.0@9.322,1.18 ; U1.0@9.374,1.078 ccw(c8.959,0.802) v1(8.788,1.27) ; U1.0@9.841,0.909 cw(c11.023,2.654) 8.915,2.654 ; Q1.E@10.225,18.109 cw(c9.67,17.554) 10.455,17.554 cw(c11.239,17.554) Q1.E@10.684,18.109 ; v1(10.236,16.688) 10.185,16.739 R1.2@10.897,16.739 10.455,17.181 Q1.E@10.455,18.339 ; v1@10.363,16.843 ccw(c10.579,17.107) R1.2@10.668,16.777 ; v1@10.378,16.546 cw(c10.842,16.082) R1.2@10.842,16.739 ; v1@10.378,16.829 ccw(c10.596,17.048) 10.596,16.739 ; v1@10.409,16.588 cw(c10.752,16.39) R1.2@10.649,16.772 ; 10.59,17.045 ccw(c10.897,17.351) R1.2@10.897,16.918 ; R1.2@10.652,16.984 cw(c10.432,16.764) R1.2@10.743,16.764 ; R1.2@10.788,16.63 ccw(c10.525,16.367) 10.525,16.739 ccw(c10.525,17.11) R1.2@10.788,16.848 ; v1@10.984,-9.282 ccw(c10.642,-8.941) 11.125,-8.941 ccw(c11.608,-8.941) v1@11.267,-9.282 ; C28.1@11.016,-8.567 cw(c10.753,-8.83) 11.125,-8.83 cw(c11.497,-8.83) C28.1@11.234,-8.567 ; v1(11.125,-9.423) C28.1@11.125,-8.458 ; C42.2@11.811,8.204 12.319,8.204 13.081,7.443 13.592,7.443 13.869,7.166 C34.2@14.779,7.166 ; C42.2@11.945,8.095 cw(c12.208,7.832) 12.208,8.204 cw(c12.208,8.576) C42.2@11.945,8.313 ; C32.1@13.021,-12.53 cw(c12.509,-13.042) 13.233,-13.042 cw(c13.958,-13.042) C32.1@13.446,-12.53 ; v1@13.092,-13.321 ccw(c12.751,-12.979) 13.233,-12.979 ccw(c13.716,-12.979) v1@13.375,-13.321 ; v1(13.233,-13.462) C32.1@13.233,-12.268 ; 14.346,7.166 cw(c14.346,6.733) C34.2@14.652,7.04 ; C34.2@14.433,7.166 ccw(c14.433,7.477) C34.2@14.652,7.257 ; v1(14.63,13.259) 14.656,13.233 T2.2@15.611,13.233 15.697,13.147 15.697,12.141 R54.1@16.154,11.684 ; v1@14.73,13.086 cw(c14.982,12.65) 15.112,13.136 ; v1@14.767,13.405 ccw(c15,13.652) 15.087,13.324 ; v1@14.772,13.117 cw(c15.052,12.837) 15.052,13.233 ; v1@14.772,13.4 ccw(c15.175,13.803) T2.2@15.175,13.233 ; v1@14.804,13.159 cw(c15.059,13.011) 14.983,13.296 ; v1@14.804,13.359 ccw(c15.204,13.59) 15.084,13.143 ; T2.2@15.358,13.486 cw(c14.748,14.096) 14.748,13.233 cw(c14.748,12.371) 15.358,12.981 cw(c14.54,12.162) 15.697,12.162 ; T2.2@15.5,13.122 cw(c15.023,12.645) 15.697,12.645 ; 15.697,12.58 cw(c16.265,12.58) T2.2@15.863,12.981 ; C39.2@15.773,-5.742 cw(c15.773,-6.175) 16.08,-5.869 ; C39.2@15.773,-5.563 16.688,-6.477 16.688,-8.356 ; 15.848,11.99 ccw(c16.154,12.297) R54.1@16.154,11.863 ; R54.1@15.909,11.929 cw(c15.69,11.709) R54.1@16,11.709 ; C39.2@15.927,-5.588 ccw(c16.238,-5.588) C39.2@16.018,-5.808 ; v1@16.077,-13.98 ccw(c15.885,-13.262) 16.529,-13.634 ; v1(16.129,-14.173) 16.773,-13.529 UB1.4@16.773,-13.396 ; v1@16.129,-13.973 ccw(c16.129,-13.49) 16.47,-13.832 ccw(c16.812,-14.173) v1@16.329,-14.173 ; v1@16.322,-14.121 cw(c16.537,-14.064) 16.344,-13.953 ; v1@16.337,-13.965 ccw(c15.769,-13.396) UB1.4@16.573,-13.396 ; C1.2@16.35,-0.298 ccw(c16.087,-0.035) 16.459,-0.035 ccw(c16.831,-0.035) C1.2@16.568,-0.298 ; C35.1@16.35,1.136 cw(c16.087,0.873) 16.459,0.873 cw(c16.831,0.873) C35.1@16.568,1.136 ; C35.1@16.35,1.404 ccw(c16.087,1.667) 16.459,1.667 ccw(c16.831,1.667) C35.1@16.568,1.404 ; C36.1@16.35,2.487 cw(c16.087,2.224) 16.459,2.224 cw(c16.831,2.224) C36.1@16.568,2.487 ; v1(16.358,-8.687) 16.688,-8.356 ; v1@16.362,-8.487 ccw(c16.373,-8.041) 16.688,-8.356 ; C1.2@16.459,-0.432 C35.1@16.459,1.27 ; C36.1@16.459,2.621 C35.1@16.459,1.27 ; v1@16.558,-8.682 cw(c17.004,-8.672) 16.688,-8.356 ; C35.1@16.568,1.161 cw(c16.831,0.898) 16.831,1.27 cw(c16.831,1.642) C35.1@16.568,1.379 ; C43.2@17.932,-2.464 v1(20.015,-2.464) 20.041,-2.489 21.971,-2.489 C45.1@21.996,-2.464 ; C43.2@18.067,-2.573 cw(c18.33,-2.836) 18.33,-2.464 cw(c18.33,-2.092) C43.2@18.067,-2.355 ; v1@18.545,0.914 ccw(c18.062,0.914) 18.404,1.256 ccw(c18.745,1.597) v1@18.745,1.114 ; v1(18.745,0.914) 18.39,1.27 C35.1@16.459,1.27 ; v1@19.874,-2.605 ccw(c19.532,-2.947) 19.532,-2.464 ccw(c19.532,-1.981) v1@19.874,-2.322 ; v1@20.157,-2.605 cw(c20.437,-2.885) 20.437,-2.489 ; v1@20.157,-2.322 ccw(c20.559,-1.92) 20.559,-2.489 ; 21.538,-2.489 ccw(c21.538,-2.031) C45.1@21.862,-2.355 ; 21.661,-2.489 cw(c21.661,-2.774) C45.1@21.862,-2.573 ; v1(8.788,1.27) cw(c9.058,0.934) 9.357,1.245 ccw(c9.058,0.934) v1(8.788,1.27) ; v1(8.788,1.27) cw(c9.032,1.472) 8.734,1.578 ccw(c9.032,1.472) v1(8.788,1.27) ; 8.915,2.088 ccw(c10.054,2.088) 9.589,1.049 cw(c10.054,2.088) 8.915,2.088 ; 8.915,2.088 cw(c7.777,2.088) 8.242,1.049 ccw(c7.777,2.088) 8.915,2.088 ; 8.915,2.088 8.915,2.654 ; U1.0@8.275,1.075 cw(c8.498,0.784) 8.686,1.098 ccw(c8.498,0.784) U1.0@8.275,1.075 ; U1.0@8.663,1.426 cw(c8.915,1.113) 9.193,1.402 ccw(c8.915,1.113) U1.0@8.663,1.426 ; U1.0@8.852,1.909 ccw(c9.347,1.733) 8.942,1.398 cw(c9.347,1.733) U1.0@8.852,1.909 ; U1.0@8.914,1.114 cw(c9.202,0.756) 9.521,1.087 ccw(c9.202,0.756) U1.0@8.914,1.114
  Bottom Layer w0.3: P2.5@-25.041,3.05 -24.077,3.05 v2(-22.631,4.496) ; v2@-22.781,4.496 cw(c-23.144,4.496) -22.887,4.24 cw(c-22.631,3.984) v2@-22.631,4.346 ; J3.6@-17.899,2.5 v2(-13.397,2.5) ; J3.6@-17.318,2.394 cw(c-17.062,2.138) -17.062,2.5 cw(c-17.062,2.862) J3.6@-17.318,2.606 ; v2@-13.503,2.394 ccw(c-13.759,2.138) -13.759,2.5 ccw(c-13.759,2.862) v2@-13.503,2.606
  Bottom Layer w0.4: C6.2@-14.062,-8.485 ccw(c-14.588,-7.959) -13.844,-7.959 ccw(c-13.101,-7.959) C6.2@-13.626,-8.485 ; v1@-13.972,-7.835 cw(c-14.265,-8.072) -13.901,-8.17 ; v1@-13.965,-7.843 cw(c-14.255,-8.134) -13.844,-8.134 ; v1(-13.894,-7.772) -13.844,-7.822 C6.2@-13.844,-8.702 ; C2.2@-11.611,-8.518 ccw(c-12.137,-7.992) -11.393,-7.992 ccw(c-10.65,-7.992) C2.2@-11.175,-8.518 ; -11.437,-8.155 cw(c-10.845,-8.313) v1@-11.151,-7.783 ; C2.2@-11.393,-8.401 cw(c-10.497,-8.401) v1@-11.131,-7.767 ; v1(-11.201,-7.696) -11.393,-7.888 C2.2@-11.393,-8.736 -9.984,-8.736 -9.449,-9.271 C3.2@-9.449,-9.906 ; C2.2@-10.972,-8.954 cw(c-10.446,-9.48) -10.446,-8.736 cw(c-10.446,-7.992) C2.2@-10.972,-8.518
  Bottom Layer w0.5: U3.1@-6.201,-8.597 cw(c-5.282,-9.516) -5.282,-8.216 ; U3.1@-6.141,-8.657 ccw(c-6.495,-8.303) -5.994,-8.303 ccw(c-5.494,-8.303) U3.1@-5.848,-8.657 ; U3.1@-5.994,-8.596 ccw(c-5.994,-8.096) -5.641,-8.45 ccw(c-5.287,-8.804) U3.1@-5.787,-8.804 ; v1(-5.994,-7.925) U3.1@-5.994,-8.804 -5.406,-8.216 C4.2@-3.962,-8.216 -3.468,-7.722 C5.2@-2.083,-7.722 ccw(c-2.083,-9.708) C4.2@-3.567,-8.387 ; U3.1@-5.848,-8.95 cw(c-4.075,-10.723) C4.2@-4.075,-8.216 ; -4.816,-8.414 ccw(c-4.998,-7.735) C4.2@-4.389,-8.087 ; -4.706,-8.385 cw(c-4.566,-8.909) C4.2@-4.295,-8.439 ; C4.2@-4.348,-8.398 ccw(c-4.788,-8.838) -4.788,-8.216 ccw(c-4.788,-7.593) C4.2@-4.348,-8.033 ; C4.2@-3.94,-8.055 cw(c-3.198,-8.716) -3.198,-7.722 ; X1.2@5.449,-9.307 5.713,-9.042 7.061,-9.042 C33.1@7.061,-8.56 ; X1.2@5.555,-9.363 cw(c6.328,-10.136) v1@6.328,-9.042 ; 5.861,-9.042 ccw(c5.861,-7.385) C33.1@7.033,-8.557 ; v1@6.424,-9.079 cw(c6.837,-9.177) 6.614,-8.816 ; v1@9.701,8.917 ccw(c10.262,9.478) C41.2@10.262,8.684 ; C41.2@10.114,8.515 ccw(c9.601,8.45) v1(9.601,8.966) v1@9.652,8.966 ; C41.2@10.113,8.527 ccw(c9.652,8.505) v1@9.652,8.966 ; 10.979,8.534 cw(c10.979,7.397) C42.2@11.783,8.201 ; C42.2@11.811,8.204 11.481,8.534 C41.2@10.312,8.534 10.084,8.534 v1@9.652,8.966
  other v1: 6.375,-9.068 9.042,-2.108 9.525,-1.575 8.407,-1.549 10.008,-1.041 7.772,-0.965 8.915,-0.965 9.423,-0.432 10.566,-0.432 8.306,-0.406 7.137,-0.381 7.747,0.127 9.982,0.127 8.814,0.152
INT_FP: J3.2 U1.6 | length 34.8
  Top Layer w0.2: v1@2.78,-6.005 ccw(c2.438,-5.664) 2.921,-5.664 ccw(c3.404,-5.664) v1@3.062,-6.005 ; v1(2.921,-6.147) 2.921,-5.105 v1(3.327,-4.699) ; v1@3.127,-4.699 cw(c2.645,-4.699) 2.986,-5.04 cw(c3.327,-5.382) v1@3.327,-4.899
  Bottom Layer w0.2: J3.2@-17.899,-1.5 -12.47,-1.5 -11.786,-2.184 -11.786,-5.258 -10.516,-6.528 0.076,-6.528 0.457,-6.147 v1(2.921,-6.147) ; J3.2@-17.283,-1.641 cw(c-16.942,-1.983) -16.942,-1.5 cw(c-16.942,-1.017) J3.2@-17.283,-1.359 ; v1@2.78,-6.288 ccw(c2.438,-6.63) 2.438,-6.147 ccw(c2.438,-5.664) v1@2.78,-6.005 ; v1(3.327,-4.699) 4.956,-4.699 U1.6@7.006,-2.649 ; v1@3.469,-4.84 cw(c3.81,-5.182) 3.81,-4.699 cw(c3.81,-4.216) v1@3.469,-4.558
IRQ_RF: U1.4
IRQ_TSM12: U1.11
KEYX_1: 1.2 2.2 3.2 U1.7 | length 70.4
  Top Layer w0.2: 3.2@-10.133,-20.987 cw(c-10.133,-22.515) -9.052,-21.435 ; 3.2@-10.133,-20.787 cw(c-10.133,-21.833) -9.393,-21.093 ; 3.2@-10.133,-20.587 cw(c-10.133,-21.15) 3.2@-9.735,-20.752 ; 3.2@-9.817,-20.037 ccw(c-9.817,-19.27) -9.275,-19.812 ; 3.2@-9.567,-20.287 cw(c-9.127,-20.287) -9.438,-19.975 ; -7.591,-16.938 ccw(c-8.051,-16.478) 3.2@-7.4,-16.478 ; -7.543,-16.89 cw(c-7.15,-17.284) 3.2@-7.15,-16.728 ; 3.2@-6.992,-16.252 -6.992,-16.339 -8.788,-18.136 -8.788,-19.325 3.2@-9.975,-20.512 -7.887,-22.6 2.2@-1.849,-22.6 2.2@-1.849,-17.4 -0.654,-16.205 6.269,-16.205 ; 2.2@-2.026,-22.777 ccw(c-2.453,-23.204) -2.453,-22.6 ccw(c-2.453,-21.996) 2.2@-2.026,-22.423 ; 2.2@-2.026,-22.148 ccw(c-2.453,-21.721) -1.849,-21.721 ccw(c-1.245,-21.721) 2.2@-1.672,-22.148 ; 2.2@-2.026,-17.852 cw(c-2.453,-18.279) -1.849,-18.279 cw(c-1.245,-18.279) 2.2@-1.672,-17.852 ; 2.2@-1.849,-17.075 ccw(c-1.849,-16.29) -1.294,-16.845 ; 2.2@-1.849,-16.875 ccw(c-1.849,-15.608) -0.953,-16.504 ; v1@3.153,-3.302 cw(c2.67,-3.302) 3.011,-3.643 cw(c3.353,-3.985) v1@3.353,-3.502 ; v1(3.353,-3.302) 2.311,-4.343 2.311,-13.208 2.616,-13.513 5.461,-13.513 6.68,-14.732 6.68,-16.616 1.2@6.854,-16.791 ; 1.2@6.41,-16.58 ccw(c5.925,-16.549) 6.269,-16.205 ; 1.2@6.483,-16.419 ccw(c6.007,-15.944) 6.68,-15.944 ; 1.2@6.644,-16.347 cw(c6.613,-15.861) 6.269,-16.205 ; 6.68,-16.042 ccw(c7.215,-16.042) 1.2@6.837,-16.419 ; 1.2@7.049,-17.235 cw(c7.049,-17.839) 7.476,-17.412 cw(c7.902,-16.985) 1.2@7.299,-16.985 ; 1.2@10.087,-20.273 ccw(c9.483,-20.273) 9.91,-19.846 ccw(c10.337,-19.42) 1.2@10.337,-20.023 ; 1.2@10.531,-20.468 1.2@6.854,-16.791 ; 6.269,-16.205 1.2@6.854,-16.791
  Bottom Layer w0.2: v1@3.494,-3.161 ccw(c4.326,-2.329) 4.326,-3.505 ; 3.843,-3.505 cw(c3.843,-2.811) v1(3.353,-3.302) 3.556,-3.505 5.585,-3.505 U1.7@6.723,-2.366
KEYX_2: 4.2 5.2 6.2 U1.8 | length 77.7
  Top Layer w0.2: 4.2@-19.346,-12.148 ccw(c-19.773,-11.721) -19.169,-11.721 ccw(c-18.565,-11.721) 4.2@-18.992,-12.148 ; 4.2@-19.346,-7.852 cw(c-19.773,-8.279) -19.169,-8.279 cw(c-18.565,-8.279) 4.2@-18.992,-7.852 ; 4.2@-19.346,-6.948 ccw(c-19.773,-6.521) -19.169,-6.521 ccw(c-18.565,-6.521) 4.2@-18.992,-6.948 ; 4.2@-19.169,-12.6 4.2@-19.169,-7.4 -19.169,-5.224 -18.149,-4.204 5.2@-18.149,-2.6 5.2@-18.149,2.6 v1@-18.149,3.771 ; 5.2@-18.326,-3.052 cw(c-18.753,-3.479) -18.149,-3.479 cw(c-17.545,-3.479) 5.2@-17.972,-3.052 ; 5.2@-18.326,-2.148 ccw(c-18.753,-1.721) -18.149,-1.721 ccw(c-17.545,-1.721) 5.2@-17.972,-2.148 ; 5.2@-18.326,2.148 cw(c-18.753,1.721) -18.149,1.721 cw(c-17.545,1.721) 5.2@-17.972,2.148 ; 5.2@-18.326,3.052 ccw(c-18.753,3.479) -18.149,3.479 ccw(c-17.545,3.479) 5.2@-17.972,3.052 ; v1@-18.277,3.643 cw(c-18.586,3.334) -18.149,3.334 ; -18.149,3.269 cw(c-17.62,3.269) v1@-17.994,3.643 ; -18.01,4.088 ccw(c-17.706,3.785) v1(-18.136,3.785) v1@-18.149,3.771 ; v1@-17.936,3.785 cw(c-17.024,3.785) -17.668,4.43 ; v1(-16.307,7.493) -15.562,7.493 6.2@-15.469,7.4 6.2@-15.469,12.6 ; v1@-16.297,7.493 cw(c-16.297,6.572) 6.2@-15.646,7.223 ; v1@-16.205,7.321 cw(c-15.964,6.913) -15.841,7.371 ; v1@-16.165,7.352 cw(c-15.824,7.01) -15.824,7.493 cw(c-15.824,7.976) v1@-16.165,7.634 ; v1@-16.134,7.593 ccw(c-15.723,7.83) -15.846,7.372 ; -15.848,7.493 ccw(c-15.848,7.779) 6.2@-15.646,7.577 ; 6.2@-15.814,7.493 cw(c-15.814,7.055) 6.2@-15.504,7.365 ; 6.2@-15.646,7.852 ccw(c-16.073,8.279) -15.469,8.279 ccw(c-14.865,8.279) 6.2@-15.292,7.852 ; 6.2@-15.646,12.148 cw(c-16.073,11.721) -15.469,11.721 cw(c-14.865,11.721) 6.2@-15.292,12.148 ; v1@0.646,0.954 ccw(c0.305,1.296) 0.787,1.296 ccw(c1.27,1.296) v1@0.929,0.954 ; v1(0.787,0.813) 0.787,5.641 -0.201,6.629 -10.867,6.629 -11.73,5.767 -16.331,5.767 -18.149,3.949 v1@-18.149,3.771
  Bottom Layer w0.2: v1@-18.277,3.926 ccw(c-18.618,4.267) -18.136,4.267 ccw(c-17.653,4.267) v1@-17.994,3.926 ; v1(-18.136,3.785) -18.136,7.264 -17.907,7.493 v1(-16.307,7.493) ; v1@-16.448,7.352 ccw(c-16.79,7.01) -16.79,7.493 ccw(c-16.79,7.976) v1@-16.448,7.634 ; v1@0.658,0.66 cw(c0.421,0.381) 0.787,0.381 ; v1(0.787,0.813) 0.787,0.381 ; v1@0.917,0.66 ccw(c1.153,0.381) 0.787,0.381 ; U1.8@6.441,-2.084 5.501,-3.023 4.191,-3.023 0.787,0.381
KEYX_3: 7.2 8.2 9.2 U1.9 | length 71.1
  Top Layer w0.2: 7.2@-10.529,20.468 7.2@-6.852,16.791 7.2@-6.58,16.791 ; 7.2@-10.335,20.023 cw(c-10.335,19.42) -9.908,19.846 cw(c-9.481,20.273) 7.2@-10.085,20.273 ; 7.2@-7.297,16.985 ccw(c-7.9,16.985) -7.474,17.412 ccw(c-7.047,17.839) 7.2@-7.047,17.235 ; 7.2@-6.658,16.846 ccw(c-6.658,17.481) -6.209,17.032 ; 7.2@-6.408,16.596 cw(c-5.836,16.596) -6.24,17.001 ; 7.2@-6.375,16.586 7.2@-6.58,16.791 ; -3.31,17.4 ccw(c-3.31,17.966) v1@-2.91,17.566 ; -3.193,17.4 cw(c-3.193,17) v1@-2.91,17.283 ; v1(-2.769,17.424) v1@-2.769,17.4 ; v1@-2.627,17.283 cw(c-2.345,17) -2.345,17.4 ; v1@-2.627,17.566 ccw(c-2.227,17.966) -2.227,17.4 ; 8.2@-2.026,17.223 ccw(c-2.453,16.796) -2.453,17.4 ccw(c-2.453,18.004) 8.2@-2.026,17.577 ; 8.2@-2.026,17.852 ccw(c-2.453,18.279) -1.849,18.279 ccw(c-1.245,18.279) 8.2@-1.672,17.852 ; 8.2@-2.026,22.148 cw(c-2.453,21.721) -1.849,21.721 cw(c-1.245,21.721) 8.2@-1.672,22.148 ; 8.2@-1.849,16.896 8.2@-1.849,17.4 ; 8.2@-1.849,22.6 8.2@-1.849,17.4 ; v1(9.093,17.018) 9.627,17.551 11.851,17.551 ; v1@9.093,17.218 ccw(c9.093,17.701) 9.435,17.359 ccw(c9.776,17.018) v1@9.293,17.018 ; 9.2@11.674,15.173 ccw(c11.247,15.6) 11.851,15.6 ccw(c12.455,15.6) 9.2@12.028,15.173 ; 9.2@11.674,19.469 cw(c11.247,19.042) 11.851,19.042 cw(c12.455,19.042) 9.2@12.028,19.469 ; 9.2@11.851,14.721 11.851,17.551 ; 9.2@11.851,19.921 11.851,17.551 ; 7.2@-6.58,16.791 -6.45,16.791 -5.841,17.4 v1@-2.769,17.4 ; v1@-2.769,17.4 8.2@-1.849,17.4
  Bottom Layer w0.2: v1@-2.769,17.224 cw(c-2.769,16.742) -2.427,17.083 cw(c-2.086,17.424) v1@-2.569,17.424 ; v1(-2.769,17.424) -2.362,17.018 3.073,17.018 ; U1.9@6.158,-1.801 5.338,-2.62 4.521,-2.62 2.058,-0.157 2.058,5.716 3.023,6.68 3.023,16.967 3.073,17.018 ; v1@8.952,16.877 ccw(c8.61,16.535) 8.61,17.018 ccw(c8.61,17.501) v1@8.952,17.159 ; v1(9.093,17.018) 3.073,17.018
KEYX_4: 0.2 #.2 *.2 U1.10 | length 74.1
  Top Layer w0.2: v1(3.353,-0.406) 4.648,-0.406 5.64,-1.398 5.64,-7.342 7.137,-8.839 13.335,-8.839 14.774,-7.4 0.2@15.472,-7.4 ; v1@3.494,-0.548 cw(c3.836,-0.889) 3.836,-0.406 cw(c3.836,0.076) v1@3.494,-0.265 ; 0.2@15.295,-12.148 ccw(c14.868,-11.721) 15.472,-11.721 ccw(c16.076,-11.721) 0.2@15.649,-12.148 ; 0.2@15.295,-7.852 cw(c14.868,-8.279) 15.472,-8.279 cw(c16.076,-8.279) 0.2@15.649,-7.852 ; 0.2@15.295,-7.577 ccw(c14.868,-8.004) 14.868,-7.4 ccw(c14.868,-6.796) 0.2@15.295,-7.223 ; 0.2@15.472,-12.6 0.2@15.472,-7.4 ; 0.2@15.649,-7.577 cw(c15.912,-7.84) 15.912,-7.468 ; 0.2@15.649,-7.223 ccw(c16.239,-6.633) 16.239,-7.468 ; v1@17.131,-4.583 ccw(c16.789,-4.242) 17.272,-4.242 ccw(c17.755,-4.242) v1@17.413,-4.583 ; v1(17.272,-4.724) 17.272,-3.886 18.151,-3.007 #.2@18.151,-2.6 #.2@18.151,2.6 20.108,2.6 v1(20.117,2.591) ; 17.631,-3.527 ccw(c16.978,-2.875) #.2@17.901,-2.875 ; v1@17.867,-7.609 ccw(c17.526,-7.95) 17.526,-7.468 ccw(c17.526,-6.985) v1@17.867,-7.326 ; #.2@17.95,-3.208 cw(c18.151,-3.409) #.2@18.151,-3.125 ; #.2@17.972,-3.186 ccw(c17.661,-2.875) #.2@18.101,-2.875 ; #.2@17.974,-2.148 ccw(c17.547,-1.721) 18.151,-1.721 ccw(c18.755,-1.721) #.2@18.328,-2.148 ; #.2@17.974,2.148 cw(c17.547,1.721) 18.151,1.721 cw(c18.755,1.721) #.2@18.328,2.148 ; v1(18.009,-7.468) 15.54,-7.468 0.2@15.472,-7.4 ; #.2@18.328,2.423 cw(c18.755,1.996) 18.755,2.6 cw(c18.755,3.204) #.2@18.328,2.777 ; *.2@18.995,7.852 ccw(c18.568,8.279) 19.172,8.279 ccw(c19.776,8.279) *.2@19.349,7.852 ; *.2@18.995,12.148 cw(c18.568,11.721) 19.172,11.721 cw(c19.776,11.721) *.2@19.349,12.148 ; *.2@19.172,12.6 *.2@19.172,7.4 19.189,7.417 v1(20.117,7.417) ; *.2@19.349,7.223 cw(c19.816,6.756) 19.816,7.417 ; *.2@19.349,7.577 ccw(c19.735,7.963) 19.735,7.417 ; 19.612,2.6 cw(c19.612,2.086) v1@19.975,2.449 ; 19.656,2.6 ccw(c19.656,3.051) v1@19.975,2.732 ; v1@19.975,7.275 ccw(c19.634,6.934) 19.634,7.417 ccw(c19.634,7.9) v1@19.975,7.558
  Bottom Layer w0.2: v1(3.353,-0.406) 3.353,-0.914 4.521,-2.083 5.31,-2.083 U1.10@5.875,-1.518 ; v1@17.131,-4.866 cw(c15.992,-6.004) 17.602,-6.004 ; v1(17.272,-4.724) cw(c16.475,-5.522) 17.602,-5.522 ; v1@17.413,-4.583 cw(c16.958,-5.039) 17.602,-5.039 ; 17.602,-4.826 17.602,-7.061 v1(18.009,-7.468) ; v1@17.809,-7.468 ccw(c17.326,-7.468) 17.667,-7.126 ccw(c18.009,-6.785) v1@18.009,-7.268 ; v1@19.975,2.732 ccw(c19.634,3.074) 20.117,3.074 ccw(c20.6,3.074) v1@20.258,2.732 ; v1@19.975,7.275 cw(c19.634,6.934) 20.117,6.934 cw(c20.6,6.934) v1@20.258,7.275 ; v1(20.117,2.591) v1(20.117,7.417)
KEYY_1: 3.1 6.1 9.1 #.1 U1.21 | length 140.2
  Top Layer w0.2: 6.1@-19.346,7.852 ccw(c-19.814,8.32) -19.152,8.32 ; 6.1@-19.346,12.148 cw(c-19.773,11.721) -19.169,11.721 cw(c-18.565,11.721) 6.1@-18.992,12.148 ; v1@-19.293,11.085 cw(c-19.634,10.744) -19.152,10.744 cw(c-18.669,10.744) v1@-19.01,11.085 ; v1@-19.293,11.368 ccw(c-19.593,11.668) -19.169,11.668 ; 6.1@-19.169,7.129 6.1@-19.169,7.4 -19.152,7.417 v1(-19.152,11.227) -19.169,11.227 6.1@-19.169,12.6 ; -19.169,11.752 ccw(c-18.627,11.752) v1@-19.01,11.368 ; -19.152,8.237 ccw(c-18.607,8.237) 6.1@-18.992,7.852 ; v1(-14.326,9.906) -13.894,9.906 ; v1@-14.173,9.777 cw(c-13.894,9.54) -13.894,9.906 ; v1@-14.173,10.035 ccw(c-13.894,10.272) -13.894,9.906 ; 3.1@-13.006,-18.39 -12.065,-17.449 -12.065,-16.172 3.1@-10.023,-14.13 -8.143,-12.25 -4.477,-12.25 -2.007,-9.779 -2.007,-8.306 -1.321,-7.62 -0.813,-7.62 0.529,-6.278 0.555,-6.278 1.501,-5.332 1.501,6.963 1.575,7.037 ; 3.1@-12.848,-17.914 ccw(c-12.848,-17.148) -12.306,-17.69 ; 3.1@-12.598,-18.164 cw(c-12.157,-18.164) -12.469,-17.853 ; -10.723,-14.83 cw(c-10.181,-15.372) 3.1@-10.181,-14.605 ; -10.56,-14.667 ccw(c-10.871,-14.355) 3.1@-10.431,-14.355 ; 3.1@-9.865,-13.655 ccw(c-9.865,-12.888) -9.323,-13.43 ; 3.1@-9.615,-13.905 cw(c-9.175,-13.905) -9.486,-13.593 ; v1@5.82,5.791 ccw(c5.337,5.791) 5.678,6.133 ccw(c6.02,6.474) v1@6.02,5.991 ; v1(6.02,5.791) 4.774,7.037 1.575,7.037 ; v1(6.147,14.732) 6.158,14.721 9.1@8.151,14.721 9.1@8.151,19.921 ; v1@6.187,10.987 ccw(c6.897,11.698) 6.897,10.693 ; v1@6.288,14.591 cw(c6.603,14.276) 6.603,14.721 ; v1@6.288,14.873 ccw(c6.656,15.241) 6.656,14.721 ; 6.414,10.693 cw(c6.414,11.215) v1(6.045,10.846) 6.198,10.693 10.363,10.693 11.862,9.194 13.26,9.194 v1(13.462,8.992) ccw(c12.974,8.503) 12.974,9.194 ; 9.1@7.974,14.544 ccw(c7.547,14.117) 7.547,14.721 ccw(c7.547,15.325) 9.1@7.974,14.898 ; 9.1@7.974,15.173 ccw(c7.547,15.6) 8.151,15.6 ccw(c8.755,15.6) 9.1@8.328,15.173 ; 9.1@7.974,19.469 cw(c7.547,19.042) 8.151,19.042 cw(c8.755,19.042) 9.1@8.328,19.469 ; 12.491,9.194 cw(c12.491,8.021) v1@13.321,8.85 ; #.1@21.674,-2.148 ccw(c21.247,-1.721) 21.851,-1.721 ccw(c22.455,-1.721) #.1@22.028,-2.148 ; #.1@21.674,2.148 cw(c21.247,1.721) 21.851,1.721 cw(c22.455,1.721) #.1@22.028,2.148 ; v1@21.71,1.357 cw(c21.368,1.016) 21.851,1.016 cw(c22.334,1.016) v1@21.992,1.357 ; v1@21.71,1.64 ccw(c21.368,1.981) 21.851,1.981 ccw(c22.334,1.981) v1@21.992,1.64 ; v1@21.715,1.645 ccw(c21.522,1.853) 21.796,1.927 ; v1@21.751,1.672 ccw(c21.608,1.919) 21.884,1.845 ; 21.818,1.845 ccw(c22.094,1.919) v1@21.951,1.672 ; #.1@21.851,-2.6 v1(21.851,1.499) #.1@21.851,2.6 ; 21.906,1.927 ccw(c22.18,1.853) v1@21.987,1.645 ; -13.894,9.906 -11.025,7.037 1.575,7.037
  Bottom Layer w0.2: v1(-19.152,11.227) -18.694,11.227 ; v1@-19.005,11.091 cw(c-18.694,10.804) -18.694,11.227 ; v1@-19.005,11.363 ccw(c-18.694,11.649) -18.694,11.227 ; v1@-14.467,9.765 ccw(c-14.808,9.423) -14.808,9.906 ccw(c-14.808,10.389) v1@-14.467,10.047 ; v1(-14.326,9.906) -17.374,9.906 -18.694,11.227 ; v1@5.878,5.65 cw(c5.537,5.308) 6.02,5.308 cw(c6.503,5.308) v1@6.161,5.65 ; v1@5.878,5.933 ccw(c5.476,6.335) 6.045,6.335 ; v1@5.904,10.704 cw(c5.562,10.363) 6.045,10.363 cw(c6.528,10.363) v1@6.187,10.704 ; v1@5.904,10.987 ccw(c5.317,11.574) 6.147,11.574 ; v1@6.005,14.591 cw(c5.664,14.249) 6.147,14.249 cw(c6.63,14.249) v1@6.288,14.591 ; 6.045,6.213 ccw(c6.441,6.213) v1@6.161,5.933 ; v1(6.147,14.732) 6.147,10.947 v1(6.045,10.846) 6.045,5.817 v1(6.02,5.791) 6.02,3.853 U1.21@7.572,2.301 ; v1(13.462,8.992) 13.487,9.017 19.558,9.017 21.851,6.724 v1(21.851,1.499) ; v1@13.603,8.85 cw(c14.006,8.447) 14.006,9.017 ; v1@13.603,9.133 ccw(c13.884,9.413) 13.884,9.017 ; v1@21.71,1.64 ccw(c21.368,1.981) 21.851,1.981 ccw(c22.334,1.981) v1@21.992,1.64
KEYY_2: 0.1 2.1 5.1 8.1 U1.30 | length 154
  Top Layer w0.2: 5.1@-22.026,-2.148 ccw(c-22.453,-1.721) -21.849,-1.721 ccw(c-21.245,-1.721) 5.1@-21.672,-2.148 ; 5.1@-22.026,2.148 cw(c-22.453,1.721) -21.849,1.721 cw(c-21.245,1.721) 5.1@-21.672,2.148 ; 5.1@-22.026,3.052 ccw(c-22.453,3.479) -21.849,3.479 ccw(c-21.245,3.479) 5.1@-21.672,3.052 ; 5.1@-21.849,-2.6 5.1@-21.849,2.6 -21.849,5.532 -21.006,6.375 -21.006,9.182 -19.799,10.389 -19.799,13.341 -19.043,14.097 -13.945,14.097 -12.751,12.903 -12.751,11.354 -9.601,8.204 1.016,8.204 v1(2.337,9.525) 2.36,9.548 10.387,9.548 13.101,6.834 14.325,6.834 15.316,5.842 v1(16.078,5.842) 16.124,5.888 18.954,5.888 v1(18.999,5.842) ; 2.1@1.674,-22.148 ccw(c1.247,-21.721) 1.851,-21.721 ccw(c2.455,-21.721) 2.1@2.028,-22.148 ; 2.1@1.674,-17.852 cw(c1.247,-18.279) 1.851,-18.279 cw(c2.455,-18.279) 2.1@2.028,-17.852 ; 8.1@1.674,16.948 cw(c1.247,16.521) 1.851,16.521 cw(c2.455,16.521) 8.1@2.028,16.948 ; 8.1@1.674,17.852 ccw(c1.247,18.279) 1.851,18.279 ccw(c2.455,18.279) 8.1@2.028,17.852 ; 8.1@1.674,22.148 cw(c1.247,21.721) 1.851,21.721 cw(c2.455,21.721) 8.1@2.028,22.148 ; v1@1.738,16.016 ccw(c1.466,16.289) 1.851,16.289 ; 2.1@1.851,-22.6 2.1@1.851,-17.4 2.714,-18.263 ; 1.851,16.427 ccw(c2.432,16.427) v1@2.021,16.016 ; 8.1@1.851,22.6 8.1@1.851,17.4 1.851,15.904 v1(1.88,15.875) ; 2.1@1.853,-17.725 cw(c1.876,-18.447) 2.387,-17.936 ; 2.1@1.859,-17.925 cw(c1.897,-19.079) 2.714,-18.263 ; v1@2.137,9.525 cw(c1.654,9.525) 1.995,9.184 cw(c2.337,8.842) v1@2.337,9.325 ; v1@2.478,9.384 cw(c2.876,8.986) 2.876,9.548 ; v1@2.478,9.666 ccw(c2.763,9.951) 2.763,9.548 ; v1@15.937,5.701 ccw(c15.595,5.359) 15.595,5.842 ccw(c15.595,6.325) v1@15.937,5.983 ; v1@16.22,5.701 cw(c16.671,5.249) 16.671,5.888 ; v1@16.22,5.983 ccw(c16.451,6.215) 16.451,5.888 ; v1(18.339,-9.068) 18.364,-9.093 19.172,-9.093 ; 18.406,5.888 cw(c18.406,5.249) v1@18.858,5.701 ; v1@18.48,-9.209 cw(c18.76,-9.489) 18.76,-9.093 ; v1@18.48,-8.926 ccw(c18.883,-8.524) 18.883,-9.093 ; 18.626,5.888 ccw(c18.626,6.215) v1@18.858,5.983 ; 0.1@18.995,-13.052 cw(c18.568,-13.479) 19.172,-13.479 cw(c19.776,-13.479) 0.1@19.349,-13.052 ; 0.1@18.995,-12.148 ccw(c18.568,-11.721) 19.172,-11.721 ccw(c19.776,-11.721) 0.1@19.349,-12.148 ; 0.1@18.995,-7.852 cw(c18.568,-8.279) 19.172,-8.279 cw(c19.776,-8.279) 0.1@19.349,-7.852 ; 0.1@19.172,-7.4 19.172,-9.093 ; 2.714,-18.263 7.087,-18.263 10.338,-21.514 11.151,-21.514 19.172,-13.492 0.1@19.172,-12.6 19.172,-9.093
  Bottom Layer w0.2: v1@1.88,15.675 cw(c1.88,15.192) 2.221,15.534 cw(c2.562,15.875) v1@2.08,15.875 ; v1(1.88,15.875) 2.337,15.418 v1(2.337,9.525) ; v1@2.195,9.666 ccw(c1.854,10.008) 2.337,10.008 ccw(c2.82,10.008) v1@2.478,9.666 ; U1.30@10.825,1.735 13.56,4.47 14.707,4.47 v1(16.078,5.842) ; v1@15.878,5.842 cw(c15.395,5.842) 15.737,5.501 cw(c16.078,5.159) v1@16.078,5.642 ; v1(18.339,-9.068) 18.843,-8.563 18.843,-6.245 18.182,-5.584 18.182,-4.586 17.842,-4.246 17.708,-4.246 17.361,-3.899 17.361,-1.93 19.456,0.165 19.456,5.385 v1(18.999,5.842) ; v1@18.339,-8.868 ccw(c18.339,-8.385) 18.68,-8.726 ccw(c19.022,-9.068) v1@18.539,-9.068 ; v1@18.999,5.642 cw(c18.999,5.159) 19.341,5.501 cw(c19.682,5.842) v1@19.199,5.842
KEYY_3: 1.1 4.1 7.1 *.1 U1.31 | length 145.5
  Top Layer w0.2: 4.1@-15.646,-12.148 ccw(c-16.073,-11.721) -15.469,-11.721 ccw(c-14.865,-11.721) 4.1@-15.292,-12.148 ; 4.1@-15.646,-7.852 cw(c-16.073,-8.279) -15.469,-8.279 cw(c-14.865,-8.279) 4.1@-15.292,-7.852 ; 4.1@-15.646,-6.948 ccw(c-16.073,-6.521) -15.469,-6.521 ccw(c-14.865,-6.521) 4.1@-15.292,-6.948 ; v1@-15.635,-10.098 cw(c-16.037,-10.5) -15.469,-10.5 ; v1@-15.635,-9.815 ccw(c-16.037,-9.414) -15.469,-9.414 ; v1(-15.494,-9.957) v1@-15.469,-9.957 ; 4.1@-15.469,-12.6 v1@-15.469,-9.957 ; -15.469,-10.379 cw(c-15.071,-10.379) v1@-15.353,-10.098 ; -15.469,-9.534 ccw(c-15.071,-9.534) v1@-15.353,-9.815 ; 7.1@-13.146,17.851 7.1@-9.469,14.174 -6.985,11.691 v1(-6.985,10.262) ; 7.1@-12.951,17.407 cw(c-12.951,16.803) -12.524,17.23 cw(c-12.098,17.657) 7.1@-12.701,17.657 ; v1@-11.495,4.913 cw(c-11.837,4.572) -11.354,4.572 cw(c-10.871,4.572) v1@-11.212,4.913 ; v1(-11.354,5.055) -11.354,-0.584 -15.469,-4.699 4.1@-15.469,-7.4 v1@-15.469,-9.957 ; 7.1@-9.913,14.369 ccw(c-10.517,14.369) -10.09,14.796 ccw(c-9.663,15.222) 7.1@-9.663,14.619 ; 7.1@-9.274,13.73 cw(c-9.274,13.126) -8.847,13.553 cw(c-8.421,13.98) 7.1@-9.024,13.98 ; v1@-7.126,10.403 ccw(c-7.468,10.744) -6.985,10.744 ccw(c-6.502,10.744) -6.844,10.403 ccw(c-6.188,11.059) -6.188,10.131 ; -6.671,10.131 cw(c-6.671,10.576) v1(-6.985,10.262) ; 1.1@9.471,-14.174 1.1@13.148,-17.851 12.192,-18.807 v1(12.192,-18.923) ; 1.1@9.665,-14.619 cw(c9.665,-15.222) 10.092,-14.796 cw(c10.519,-14.369) 1.1@9.915,-14.369 ; v1@12.392,-18.923 cw(c13.155,-18.923) 12.615,-18.383 ; 1.1@12.703,-17.657 ccw(c12.1,-17.657) 12.526,-17.23 ccw(c12.953,-16.803) 1.1@12.953,-17.407 ; 1.1@12.898,-17.851 cw(c12.294,-17.851) 12.721,-18.278 cw(c13.148,-18.705) 1.1@13.148,-18.101 ; 14.655,7.214 cw(c14.655,6.308) *.1@15.295,6.948 ; 15.082,7.214 ccw(c15.082,7.515) *.1@15.295,7.302 ; *.1@15.295,7.852 ccw(c14.868,8.279) 15.472,8.279 ccw(c16.076,8.279) *.1@15.649,7.852 ; *.1@15.295,12.148 cw(c14.868,11.721) 15.472,11.721 cw(c16.076,11.721) *.1@15.649,12.148 ; *.1@15.472,7.4 *.1@15.472,12.6 ; *.1@15.649,6.948 cw(c16.289,6.308) 16.289,7.214 ; *.1@15.649,7.302 ccw(c15.862,7.515) 15.862,7.214 ; v1@17.004,7.072 ccw(c16.662,6.731) 16.662,7.214 ccw(c16.662,7.696) v1@17.004,7.355 ; v1(17.145,7.214) 13.259,7.214 10.341,10.131 -6.855,10.131 v1(-6.985,10.262)
  Bottom Layer w0.2: v1@-15.635,-10.098 cw(c-16.467,-10.93) -15.291,-10.93 ; -15.291,-10.447 ccw(c-15.985,-10.447) v1(-15.494,-9.957) -15.291,-10.16 -15.291,-14.157 -15.893,-14.76 -15.893,-17.483 -13.983,-19.393 -12.662,-19.393 -9.961,-22.094 -1.238,-22.094 0.127,-23.459 6.833,-23.459 11.369,-18.923 v1(12.192,-18.923) ; v1@-11.495,5.196 ccw(c-11.837,5.537) -11.354,5.537 ccw(c-10.871,5.537) v1@-11.212,5.196 ; v1(-11.354,5.055) -11.354,5.893 v1(-6.985,10.262) ; v1@-7.185,10.262 cw(c-7.668,10.262) -7.326,9.92 cw(c-6.985,9.579) v1@-6.985,10.062 ; U1.31@11.107,1.424 U1.31@11.107,1.452 12.141,2.486 12.163,2.486 13.716,4.039 15.095,4.039 17.12,6.063 17.12,7.188 v1(17.145,7.214) ; v1@12.051,-19.064 ccw(c11.709,-19.406) 11.709,-18.923 ccw(c11.709,-18.44) v1@12.051,-18.782 ; v1@17.004,7.072 cw(c16.723,6.792) 17.12,6.792 ; 17.12,6.669 cw(c17.689,6.669) v1@17.286,7.072
LED_GREEN: U1.17
LED_RED: U1.18